# Altium PCB JUNORPCFront.PcbDoc (part 1 of 2)
Units mm, origin at the board's own origin, x right, y up, seen from the top; angles counter-clockwise.
Board outline 105.76 x 80.76 mm, 8 copper layers (Top Layer, Internal Plane 1, Signal Layer 1, Internal Plane 2, Signal Layer 2, Internal Plane 3, Internal Plane 4, Bottom Layer), stack 1.684 mm thick; 360 components, 183 nets, 1164 pads, 385 vias.
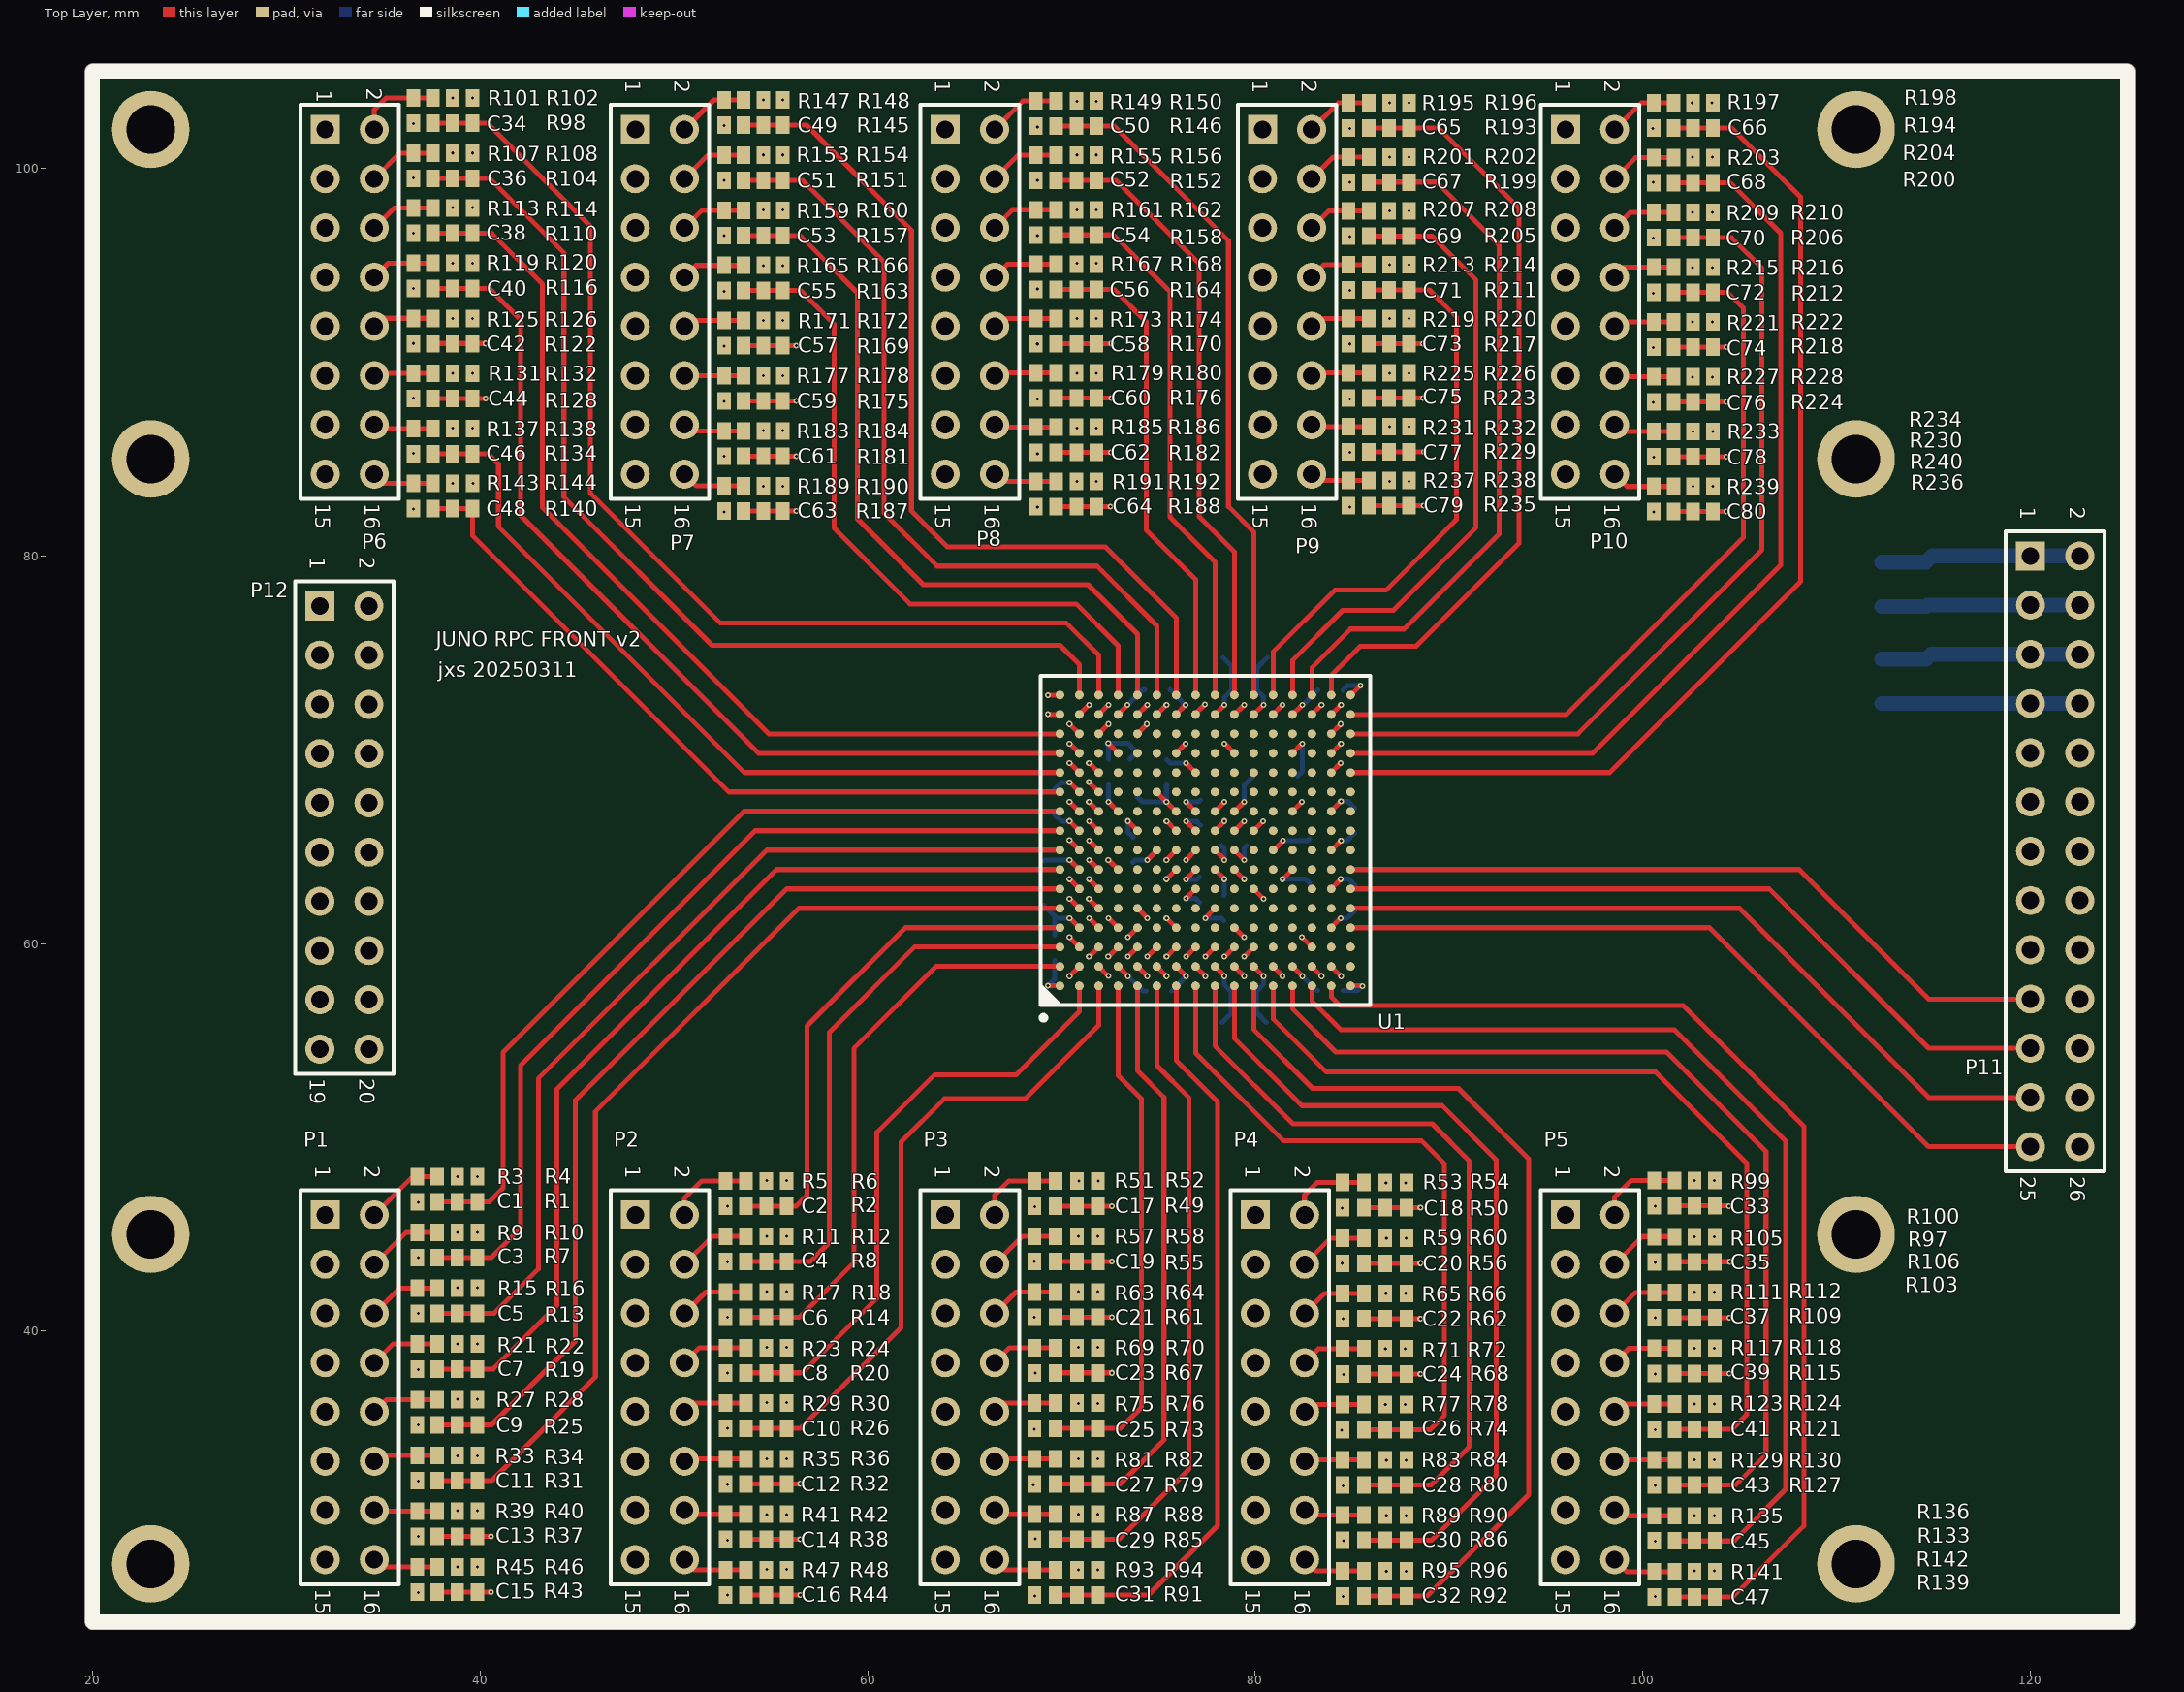
[diagram p0: Top Layer view]
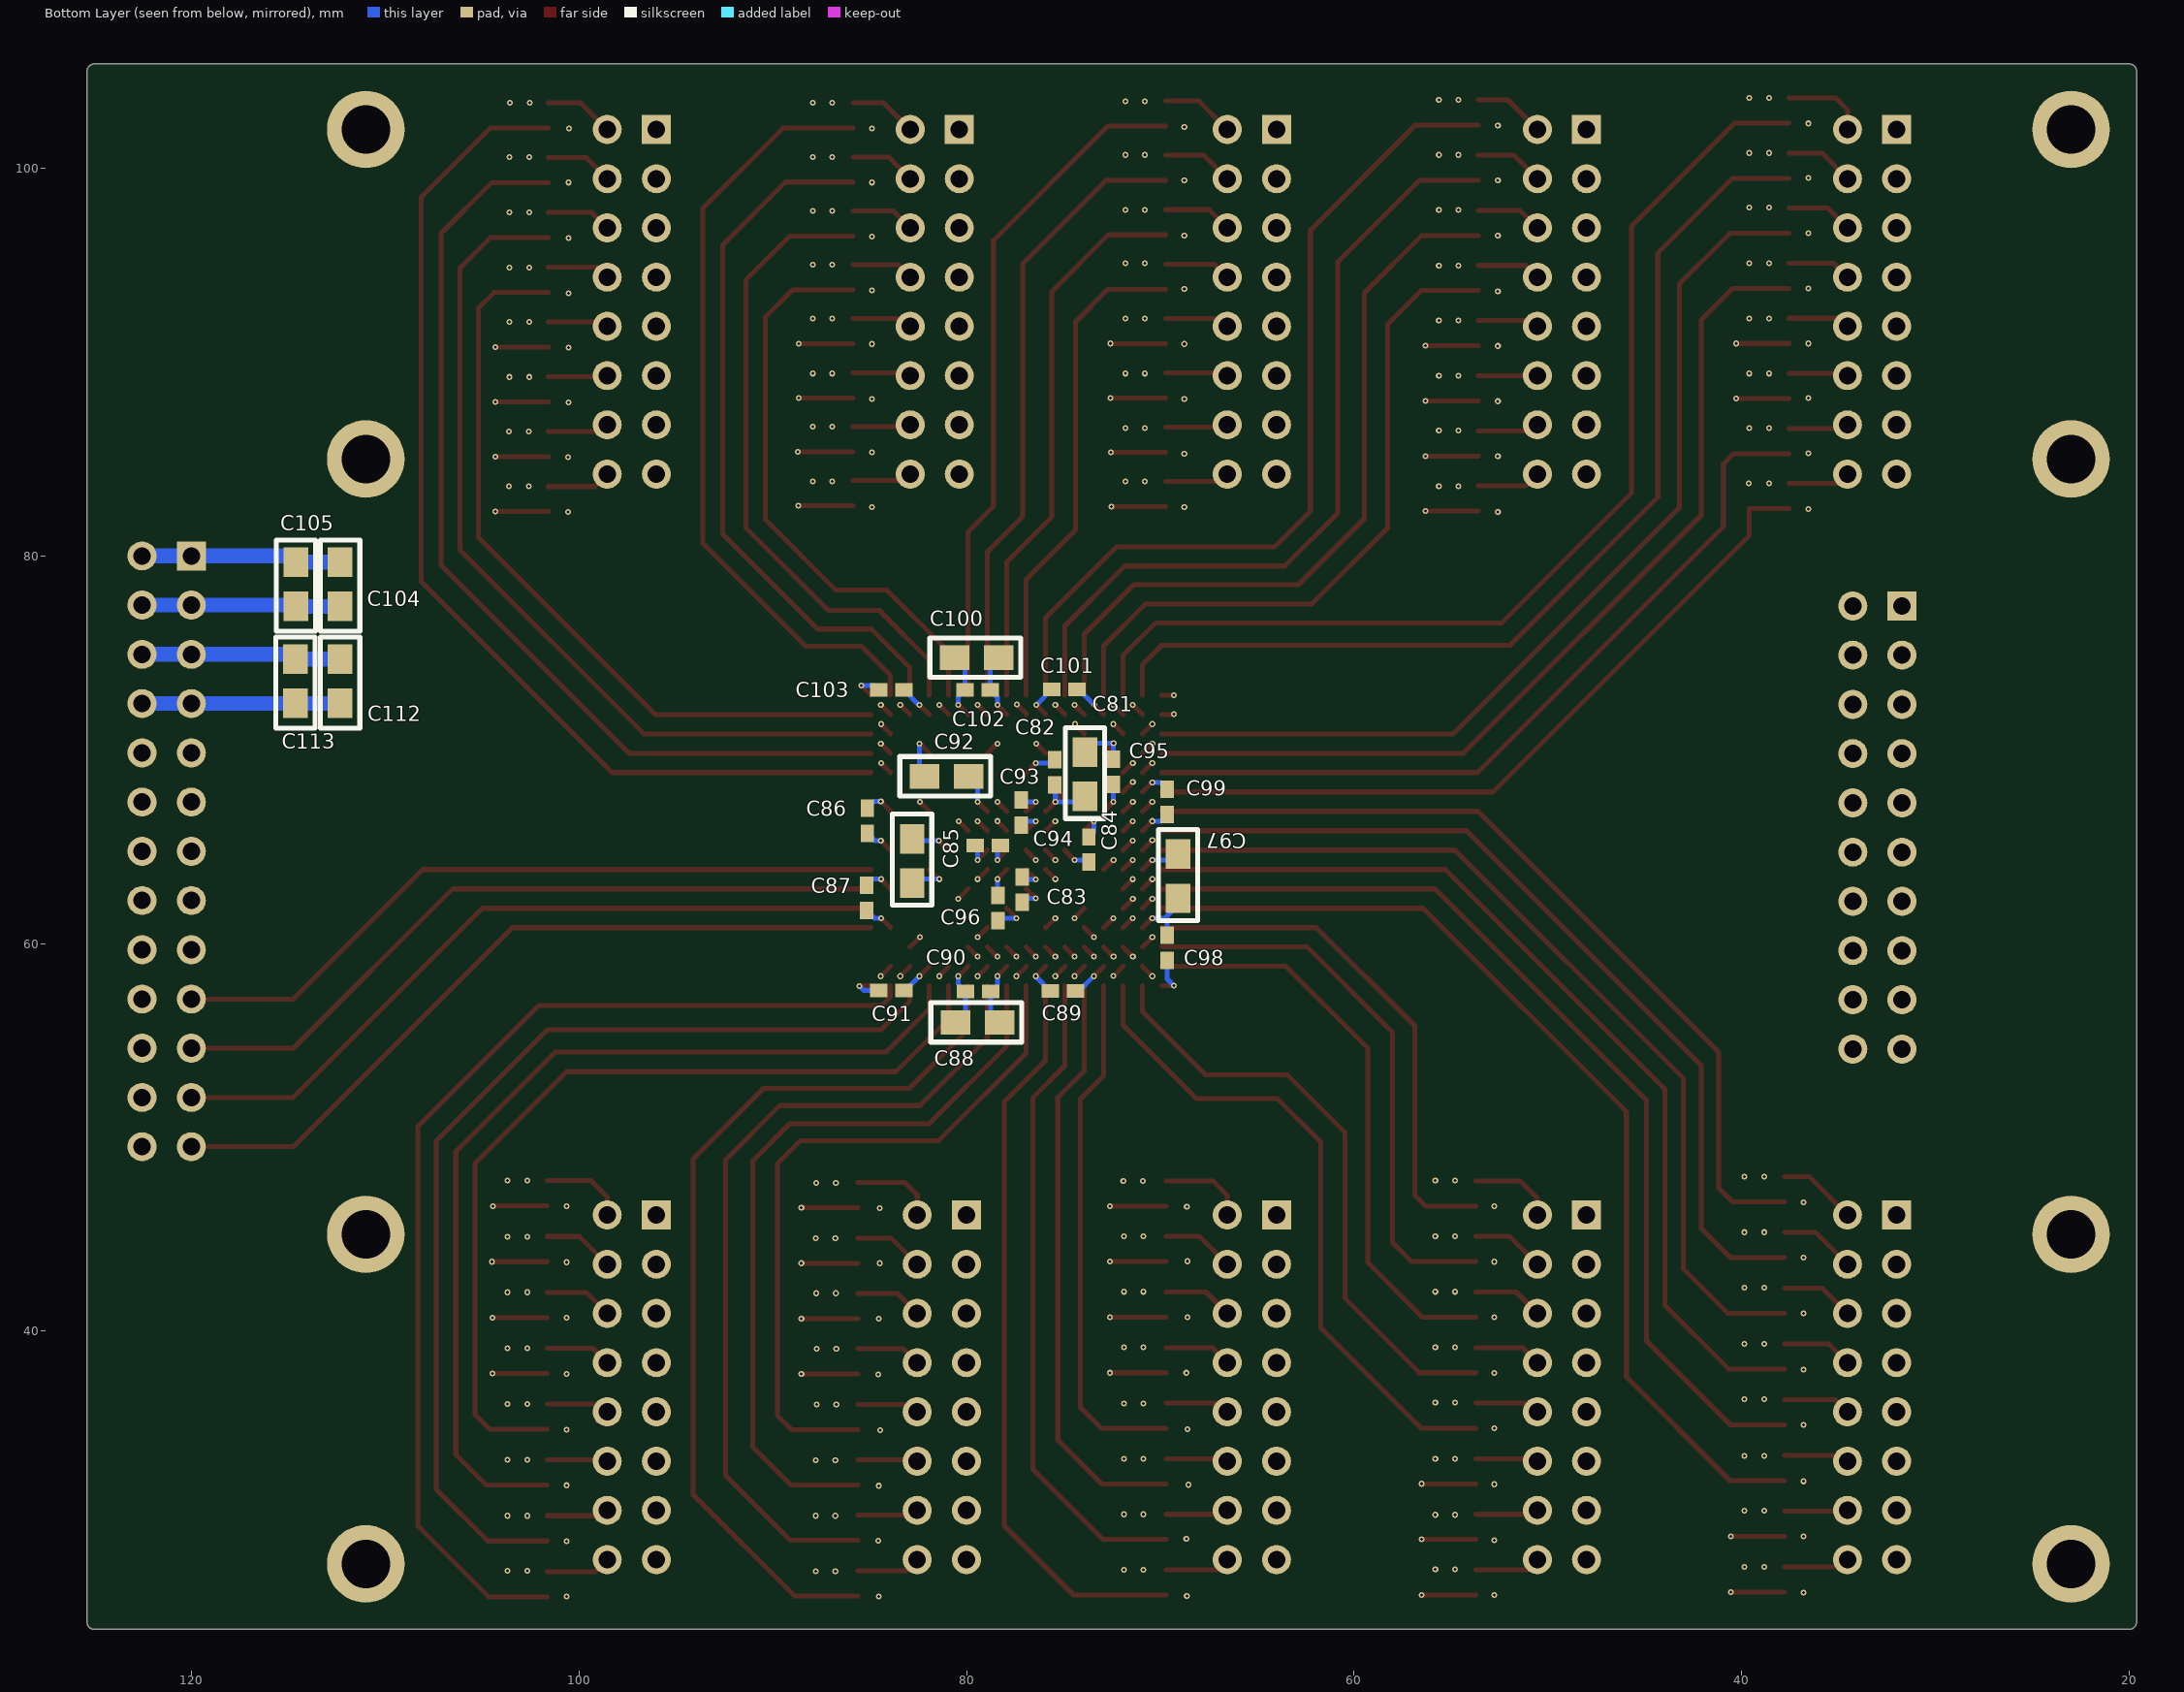
[diagram p1: Bottom Layer view, seen from below]
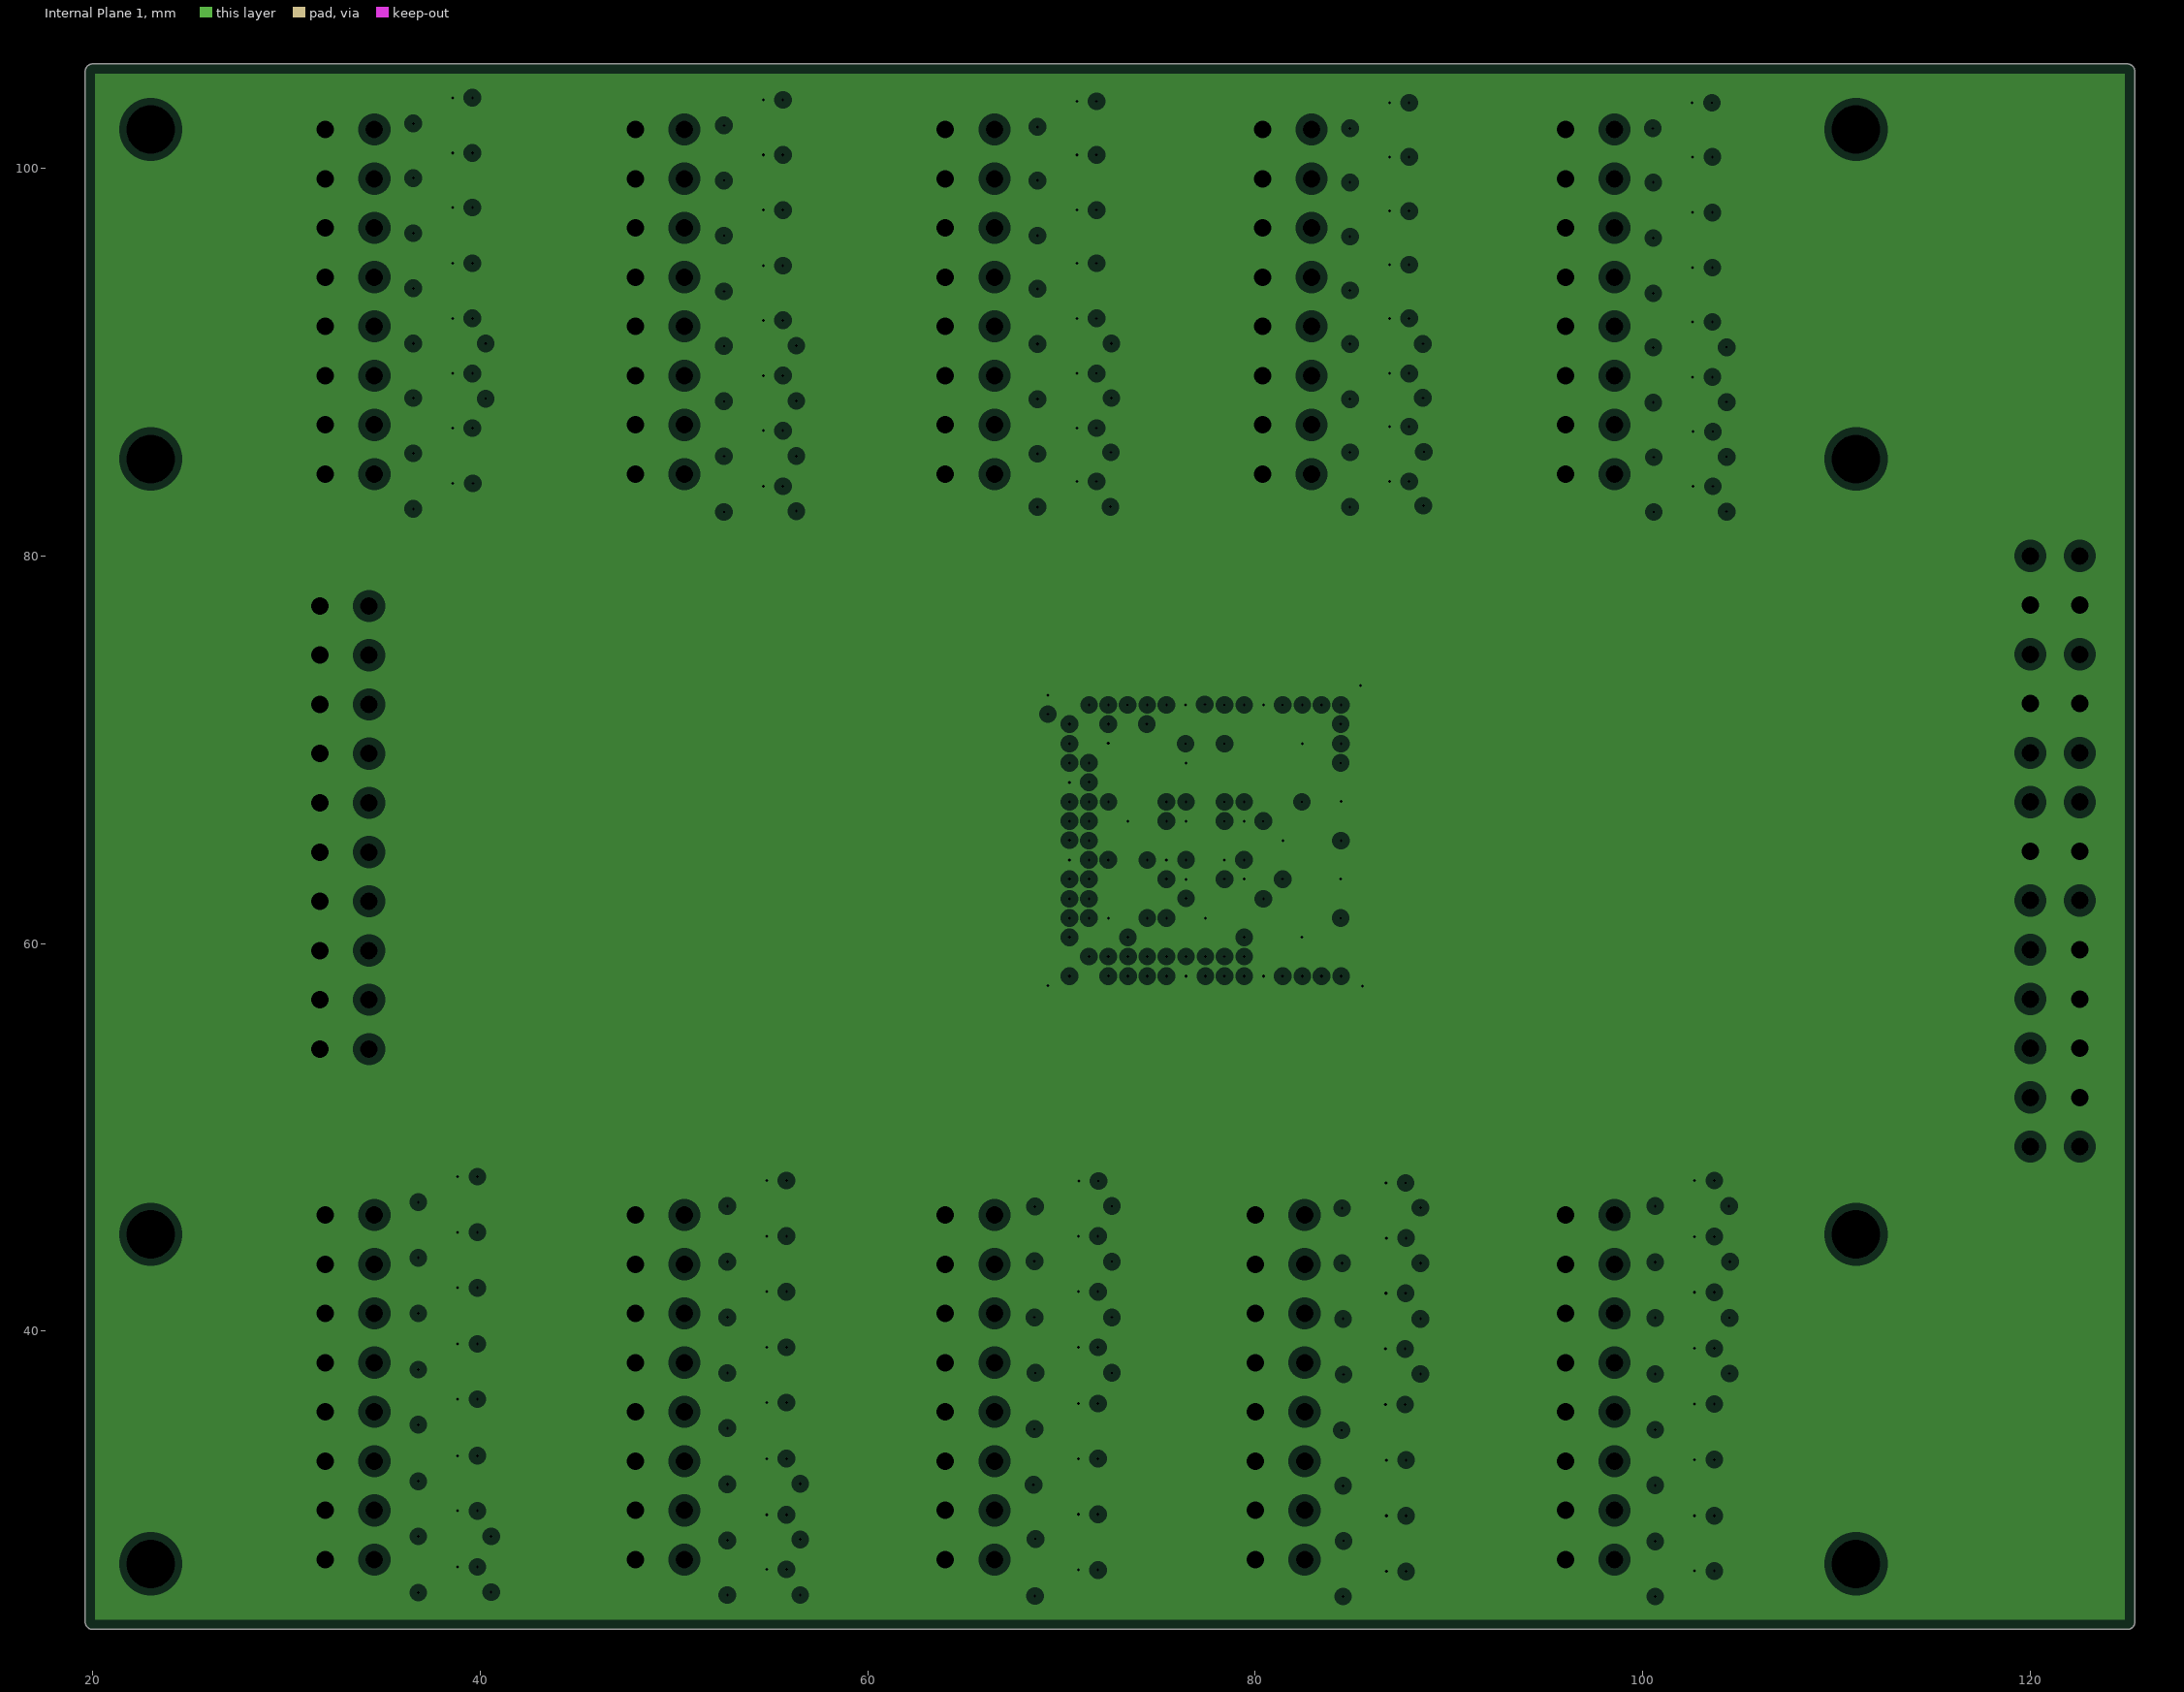
[diagram p2: Internal Plane 1, clearances drawn from the general rule]
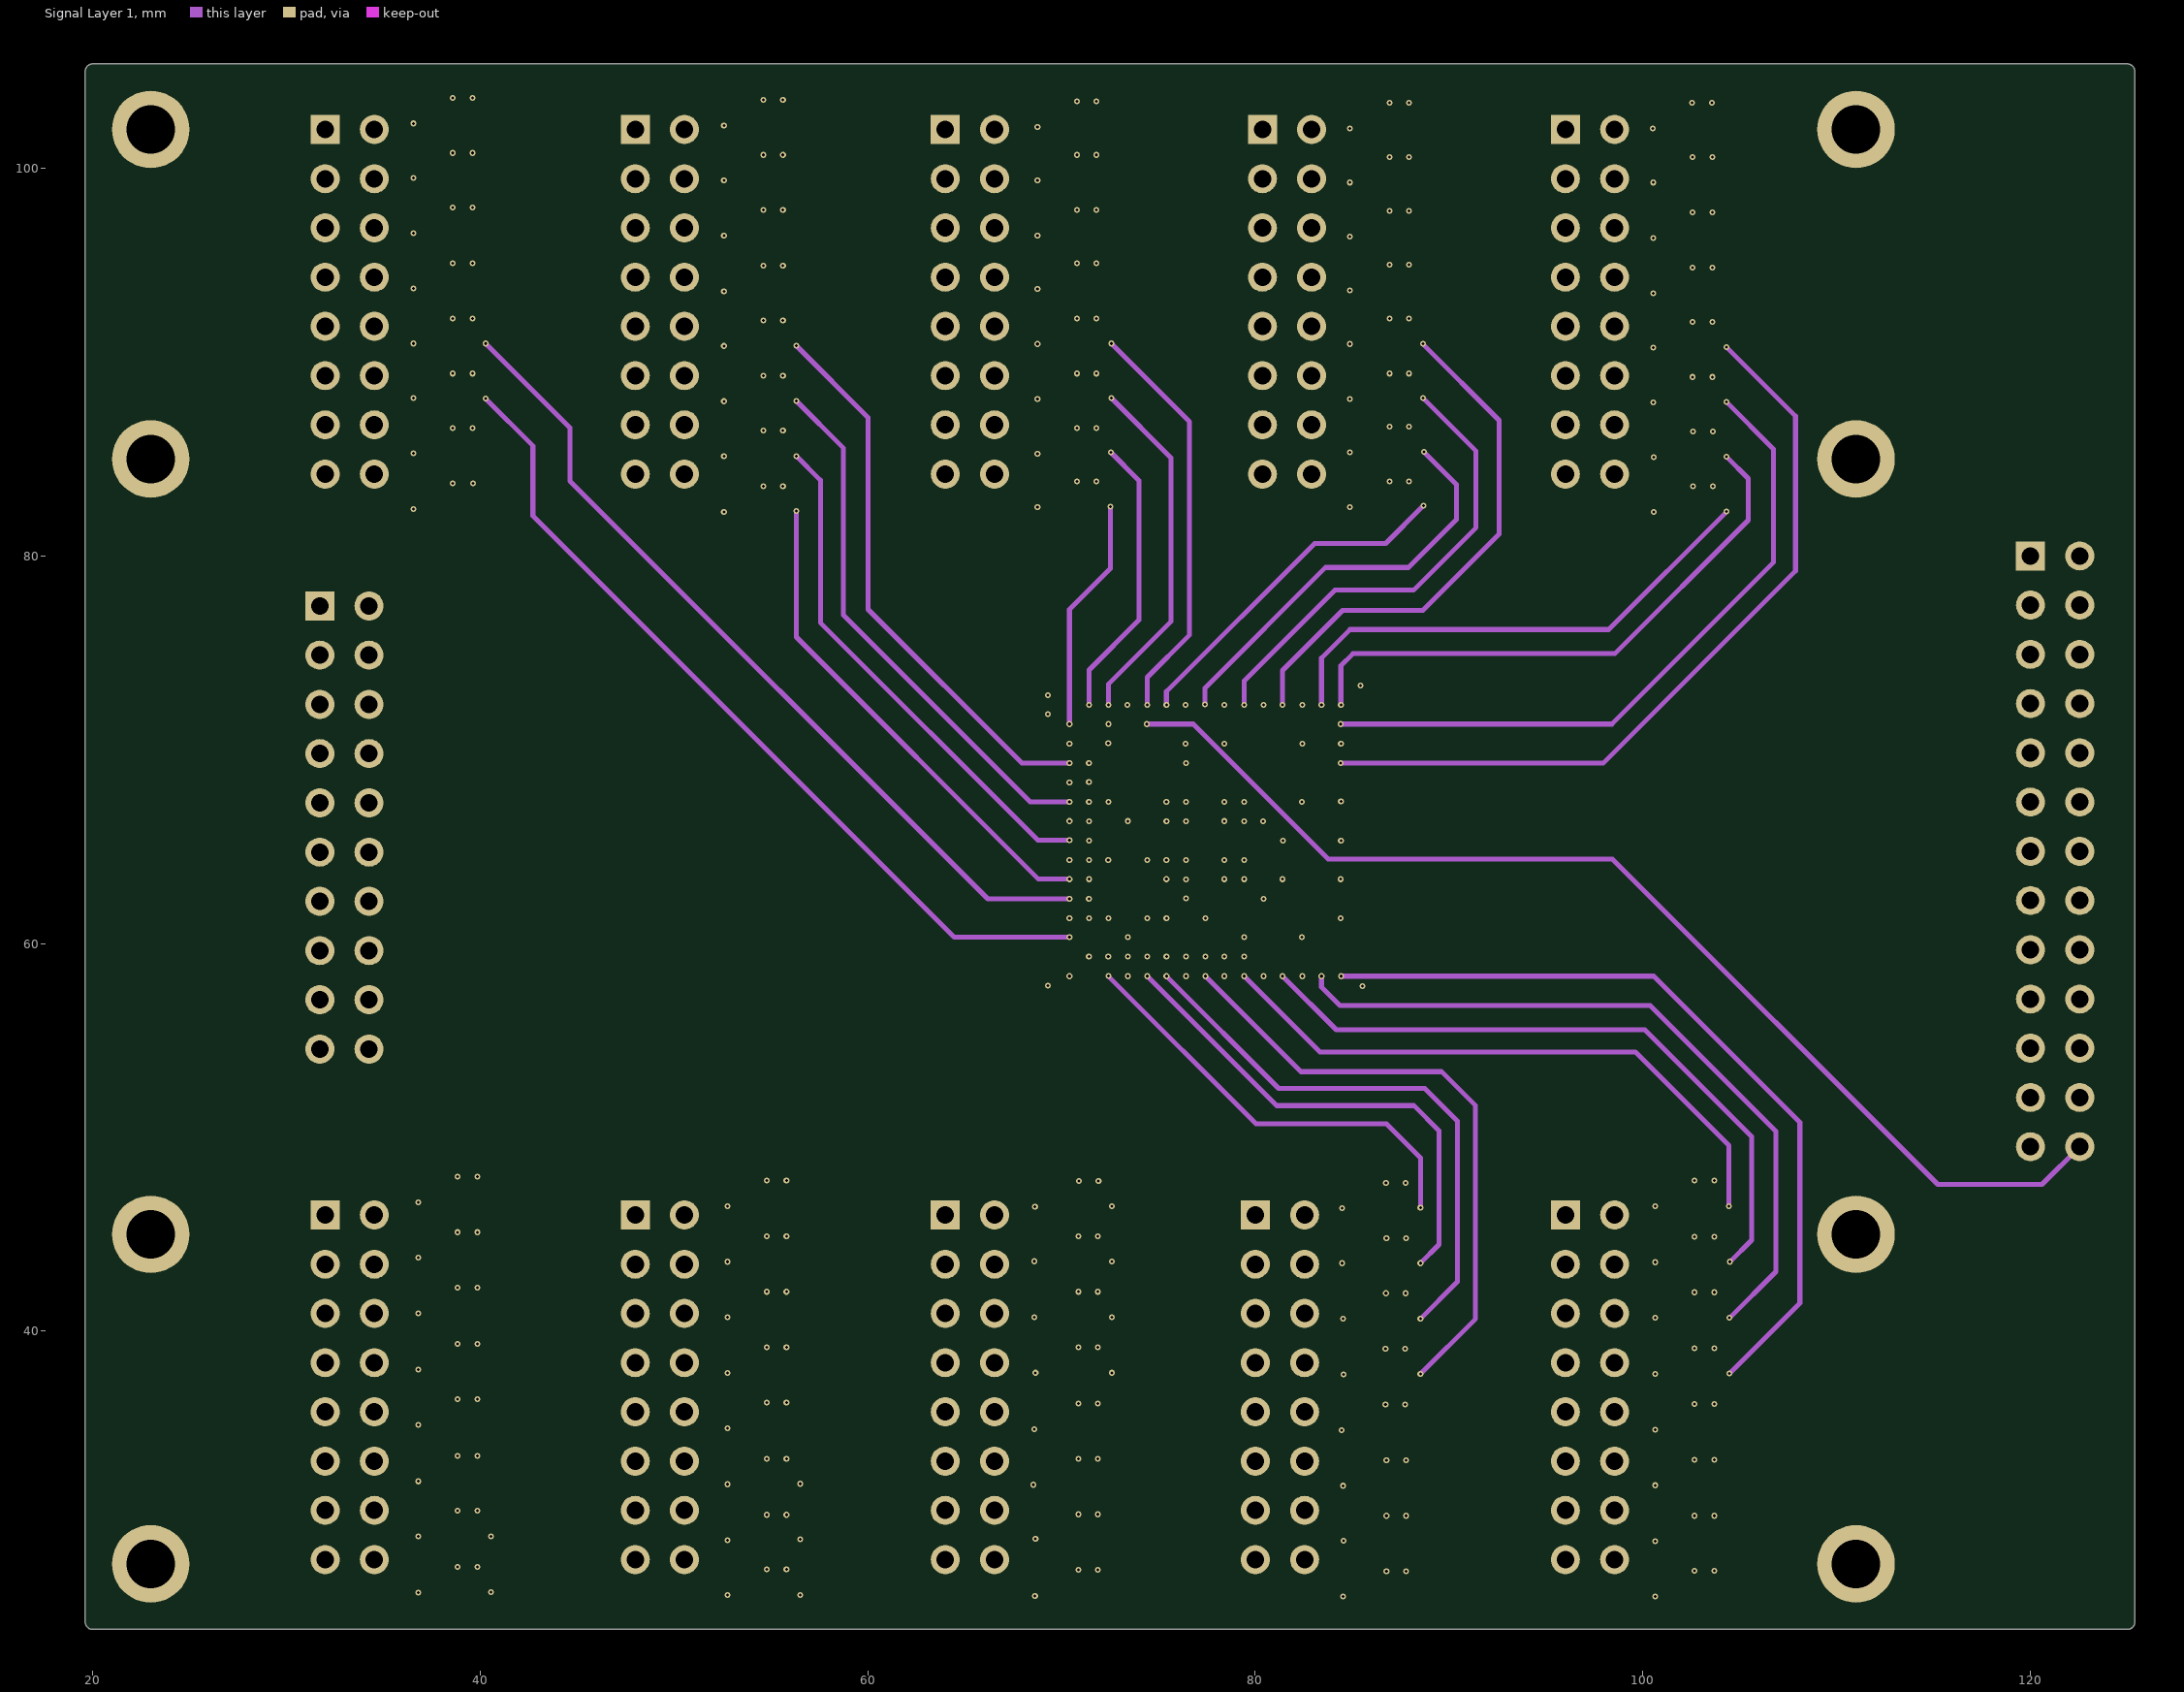
[diagram p3: Signal Layer 1]
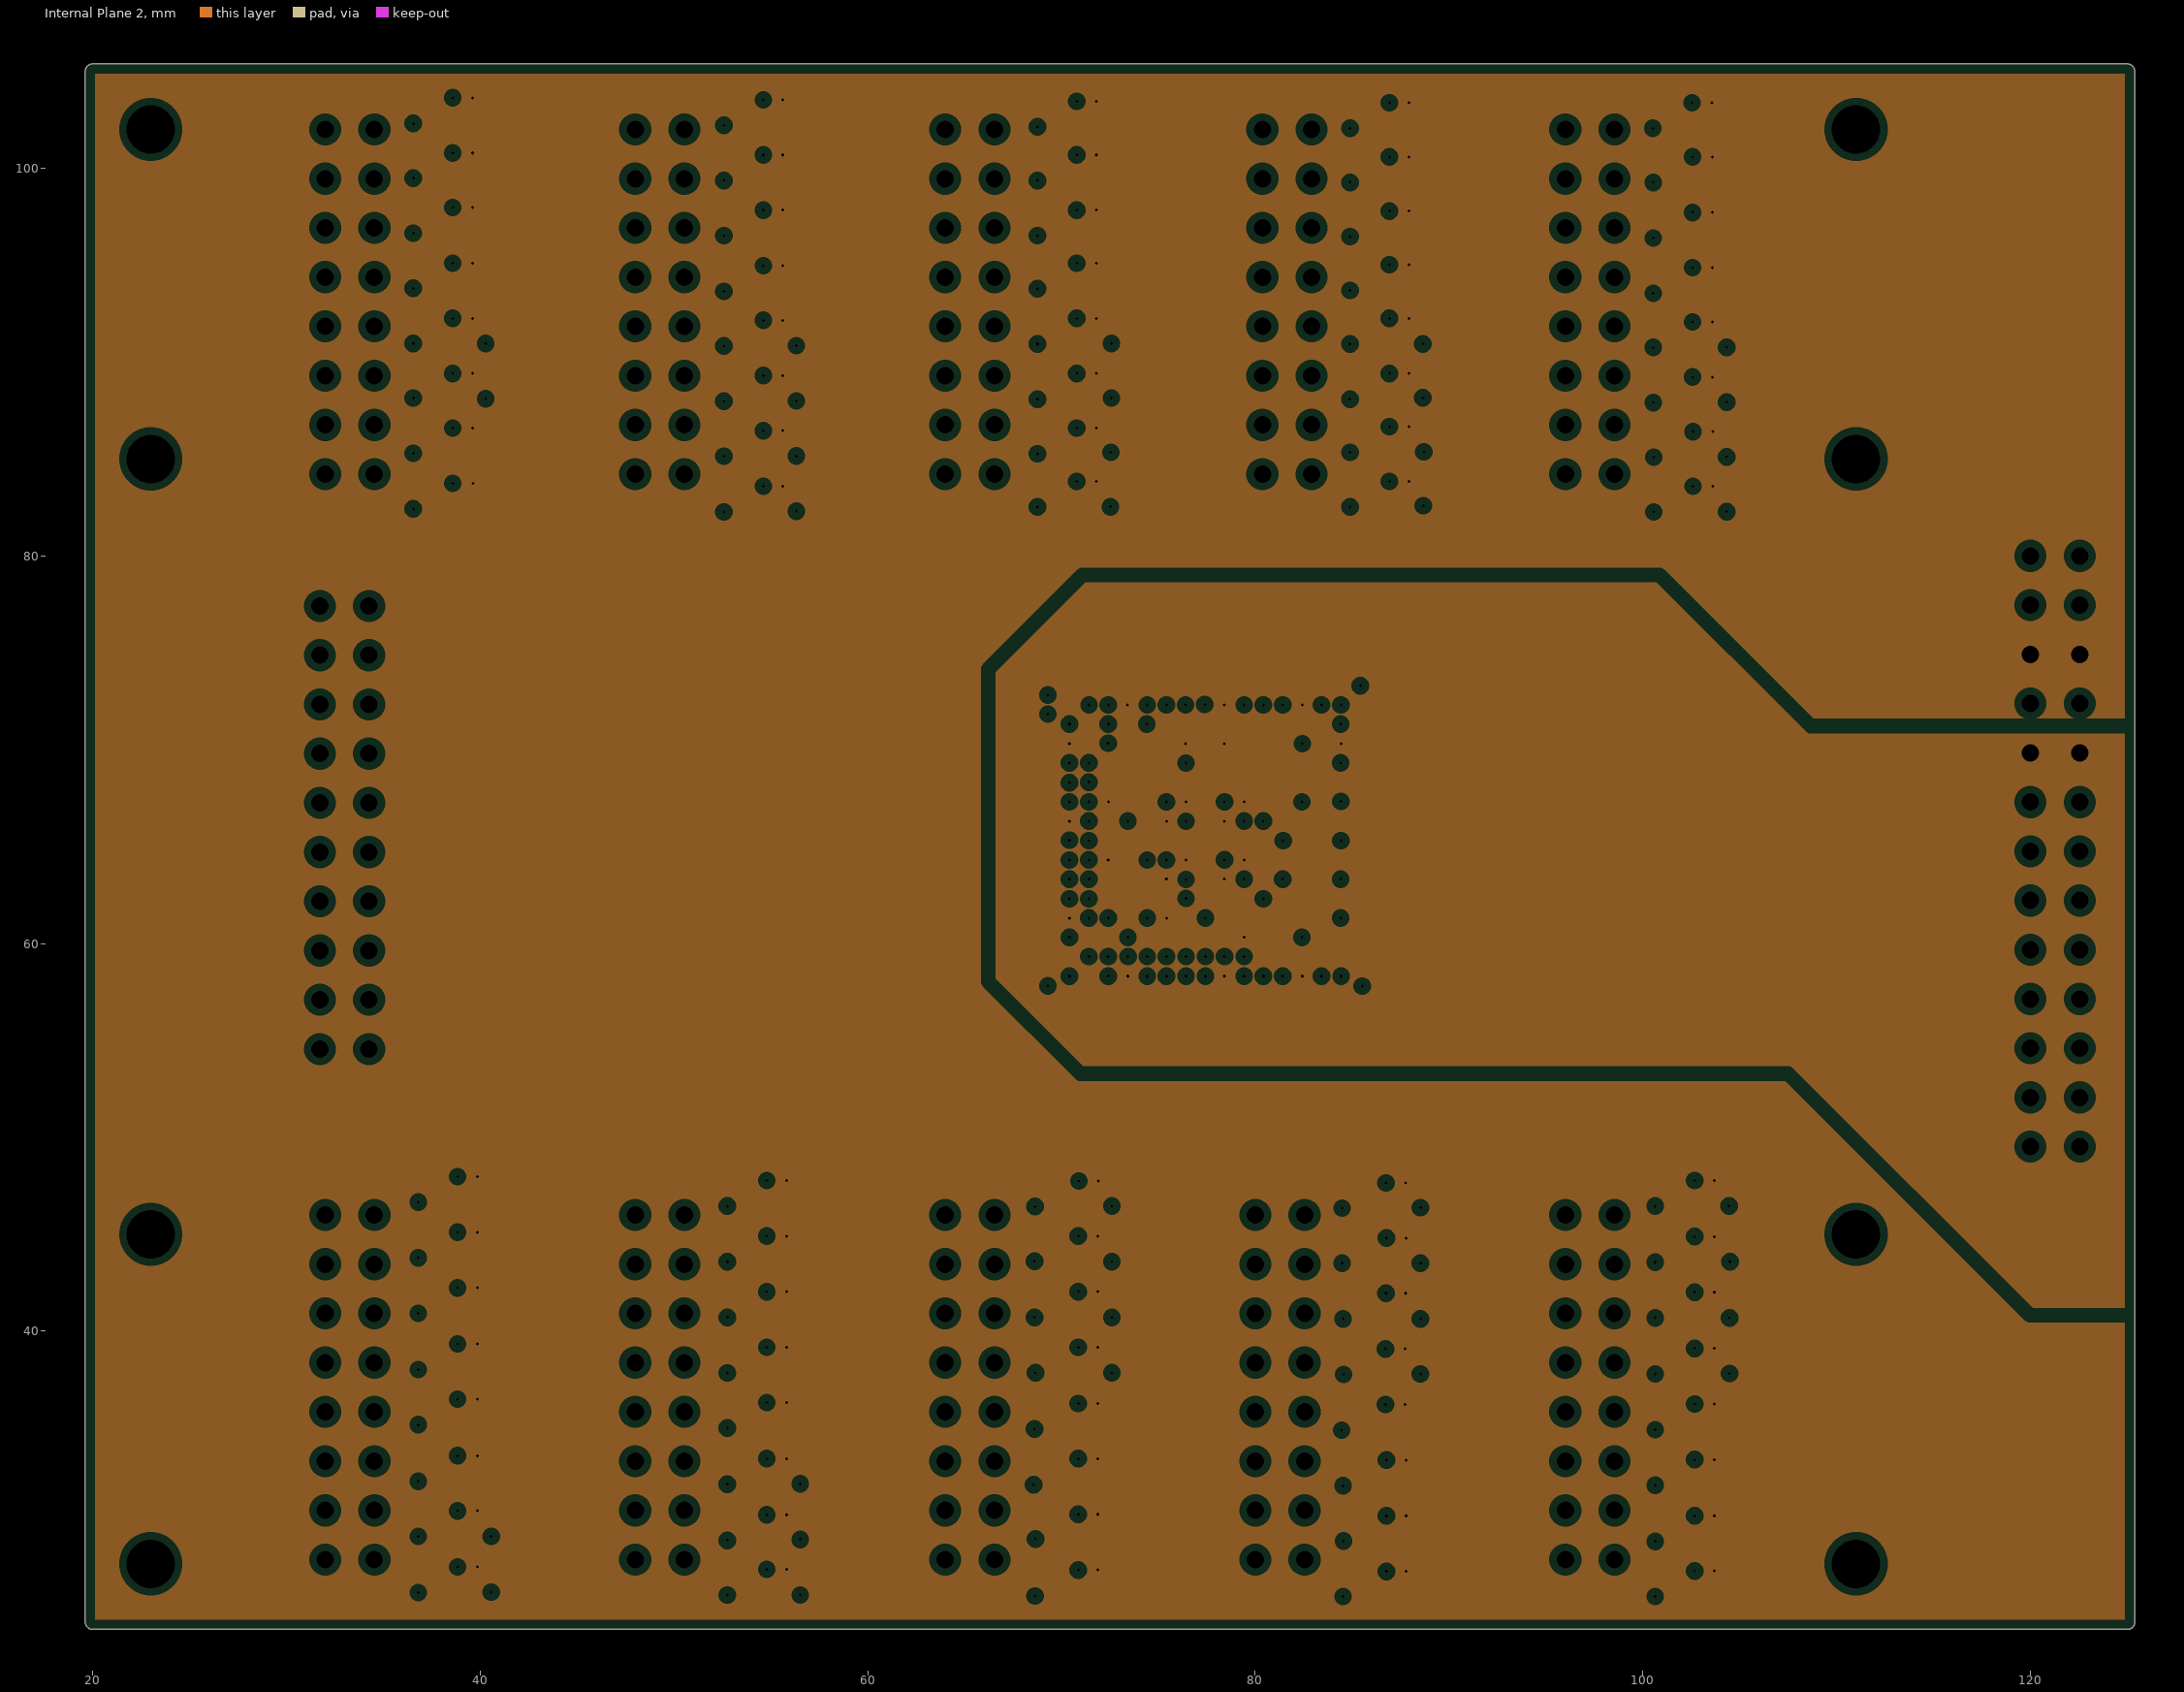
[diagram p4: Internal Plane 2, clearances drawn from the general rule]
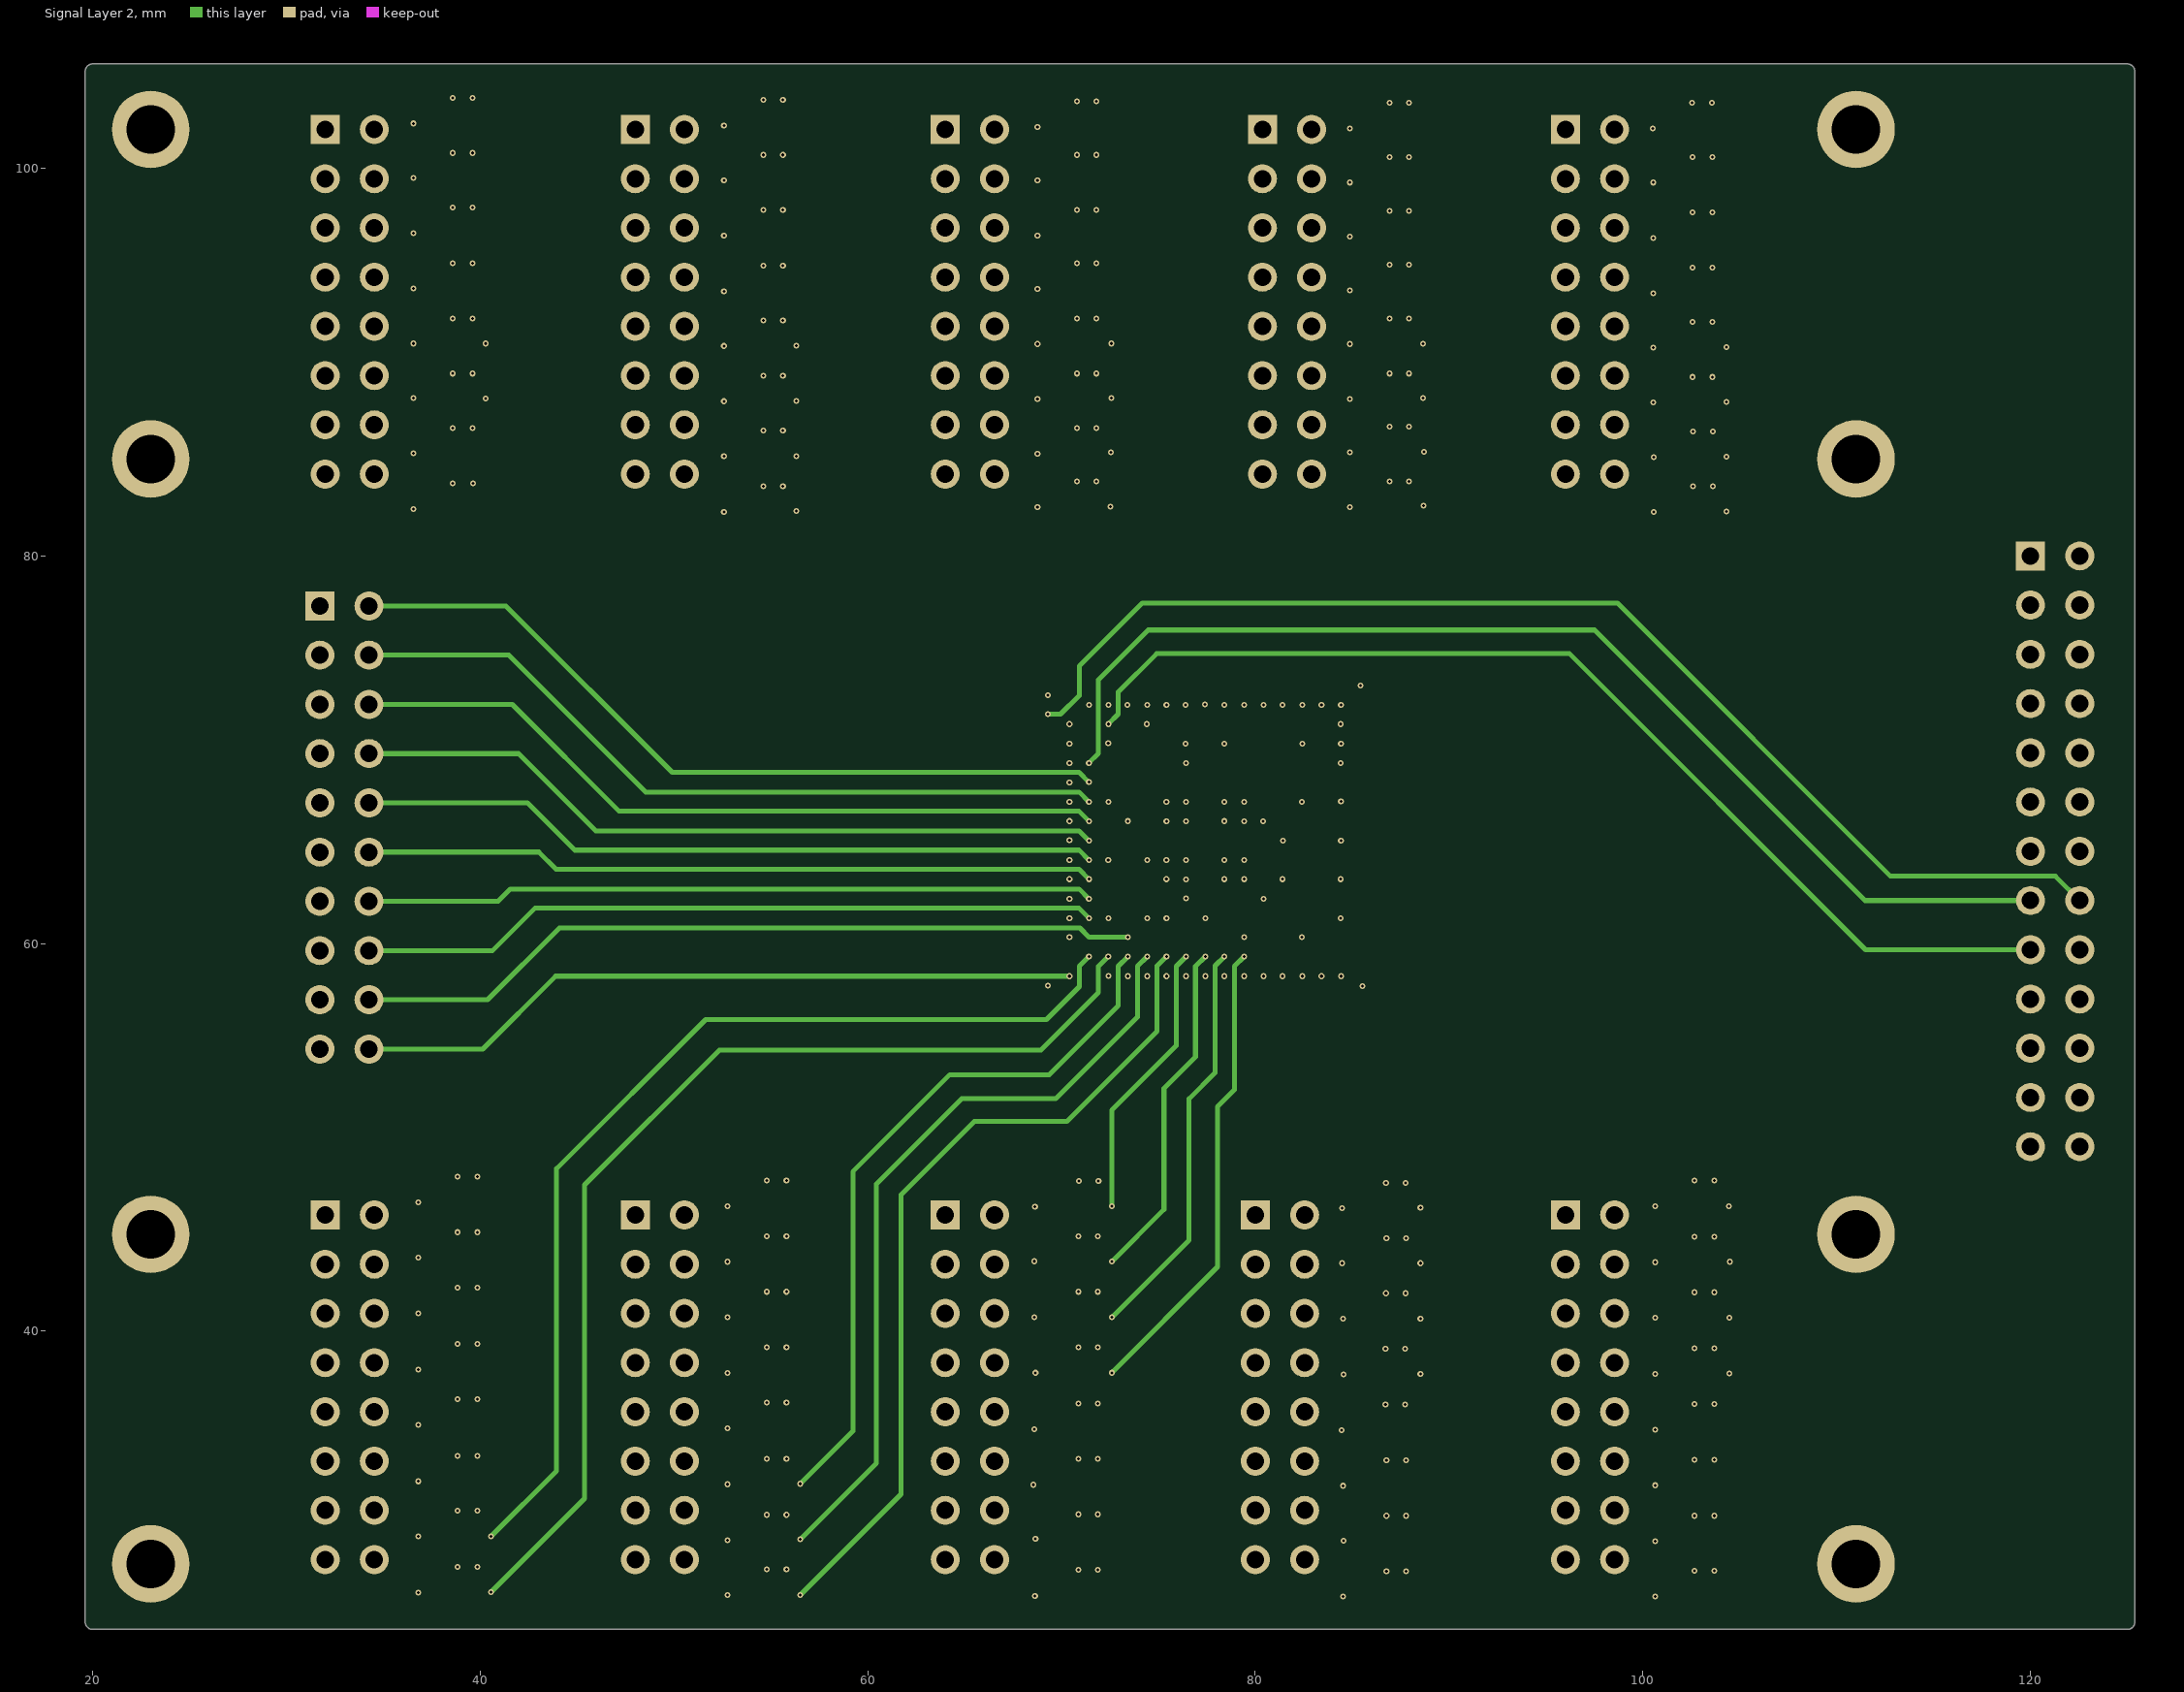
[diagram p5: Signal Layer 2]
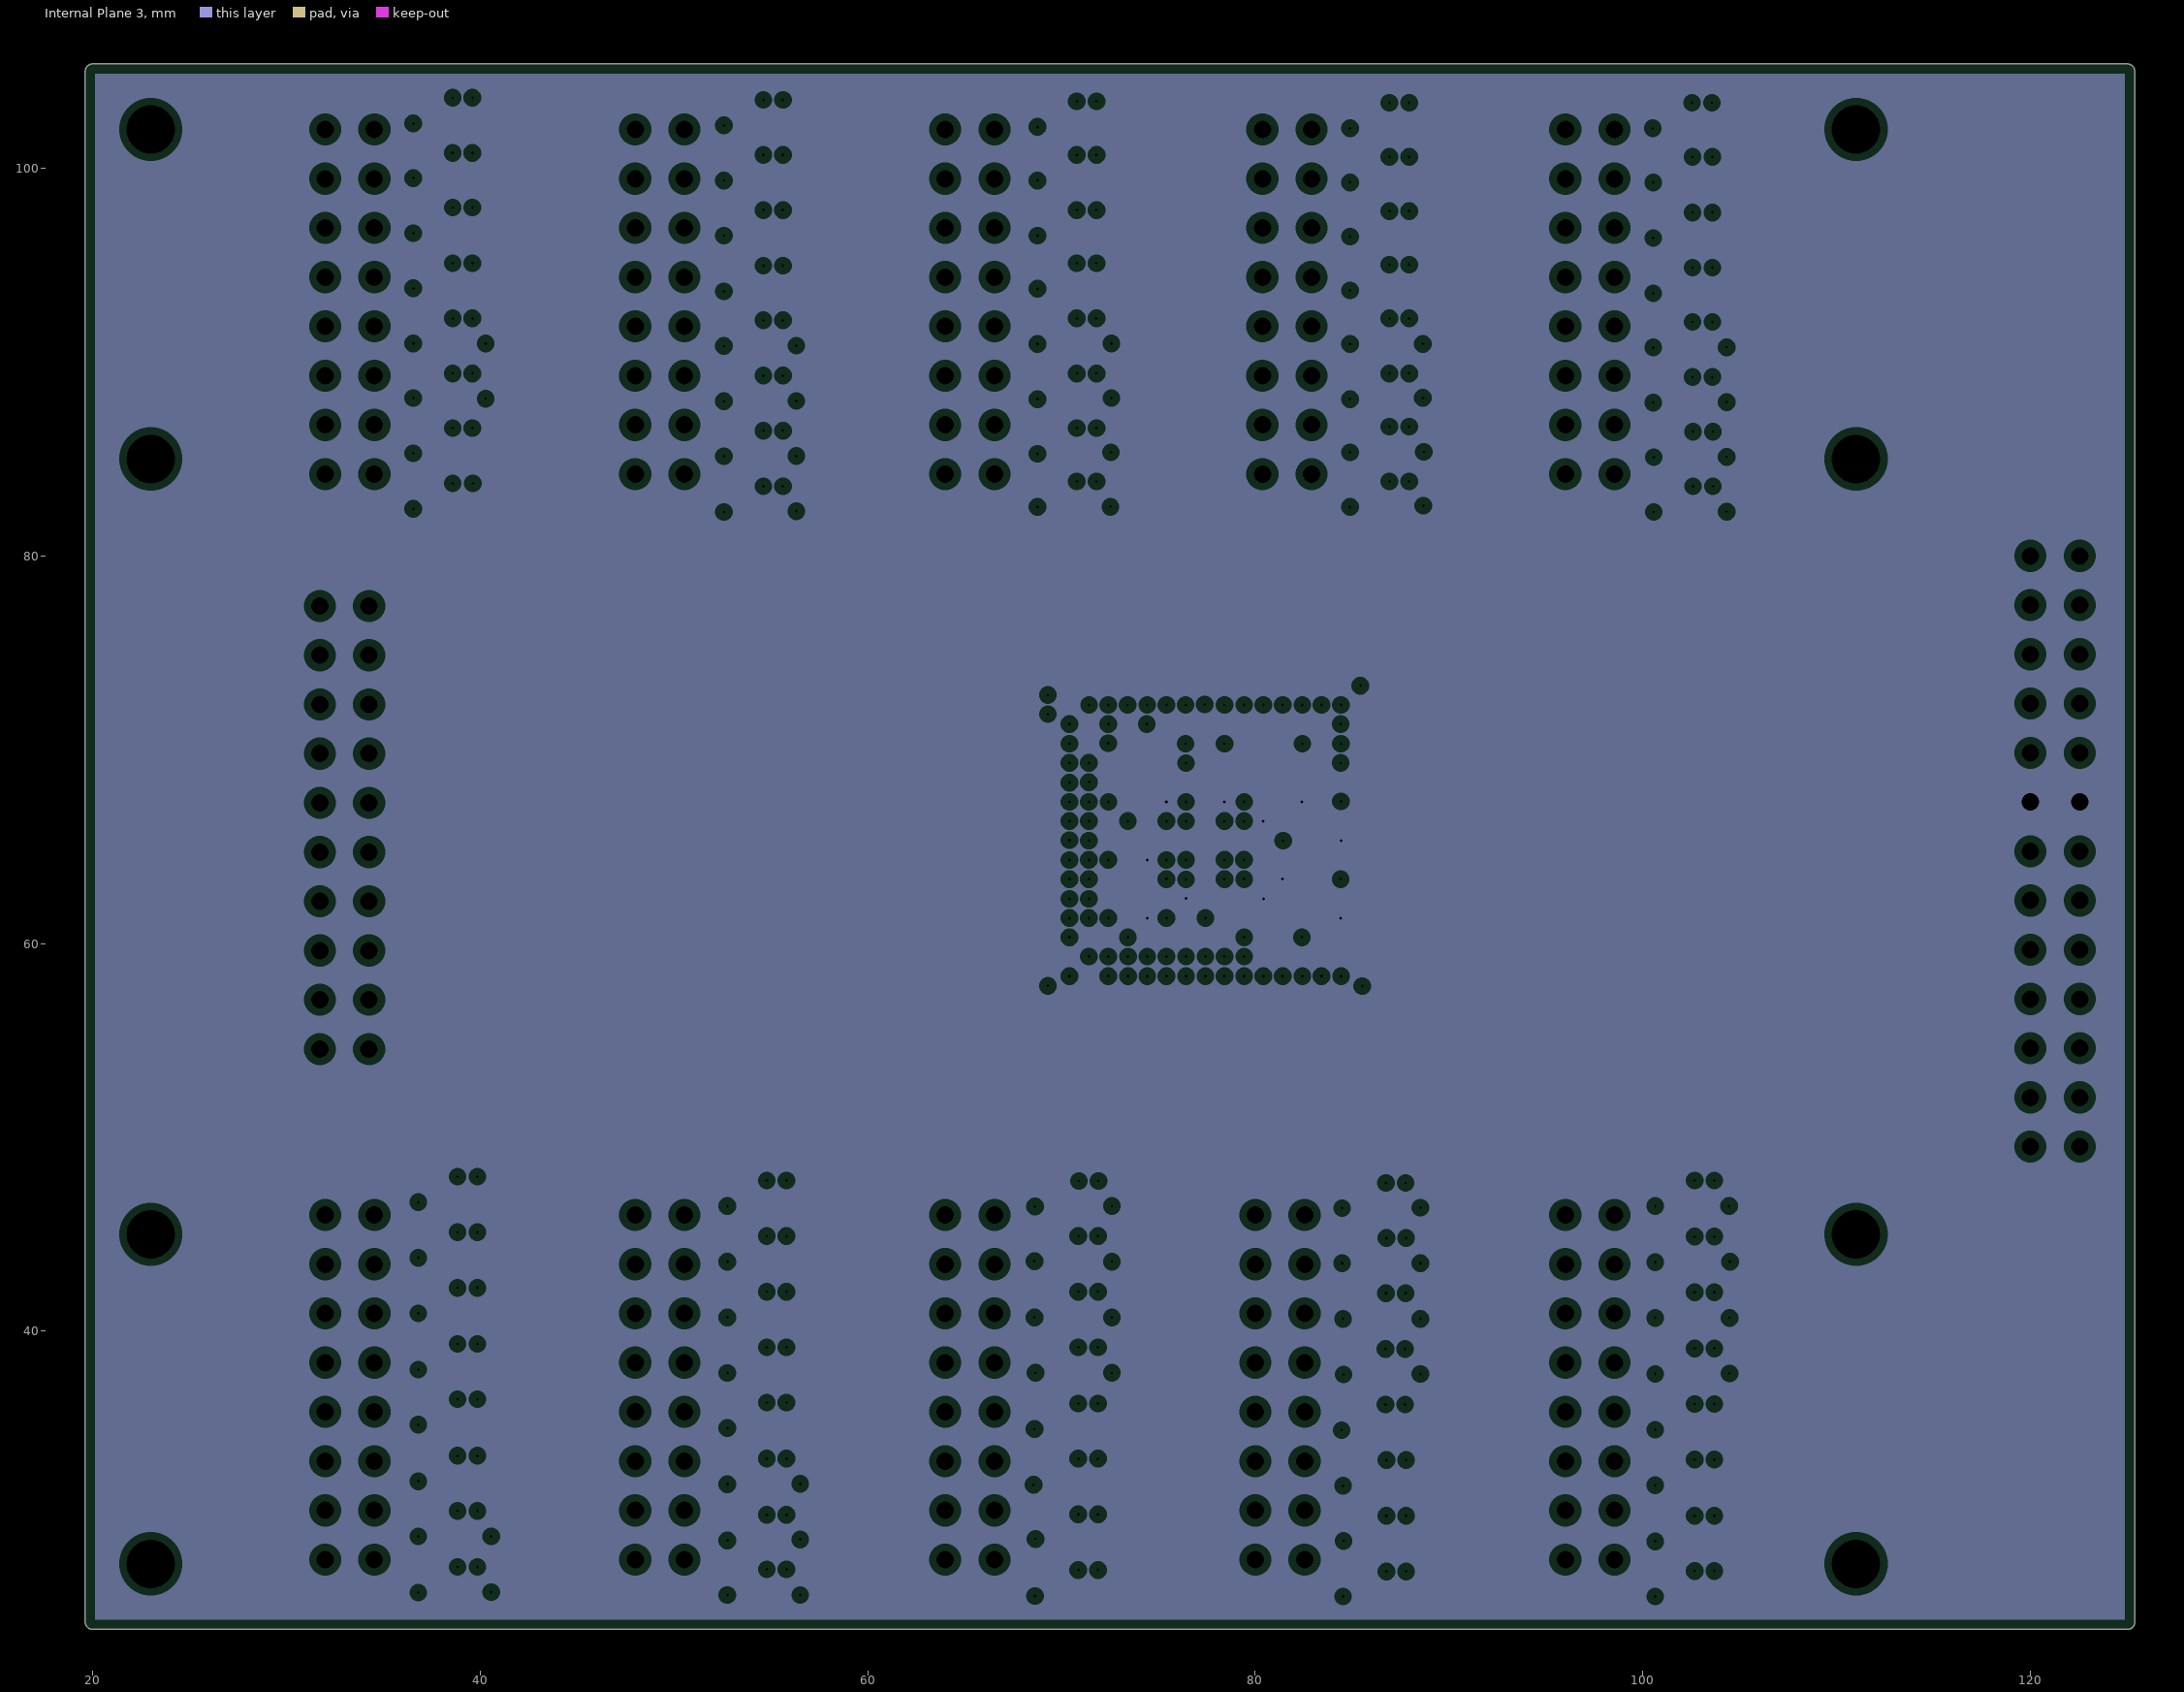
[diagram p6: Internal Plane 3, clearances drawn from the general rule]
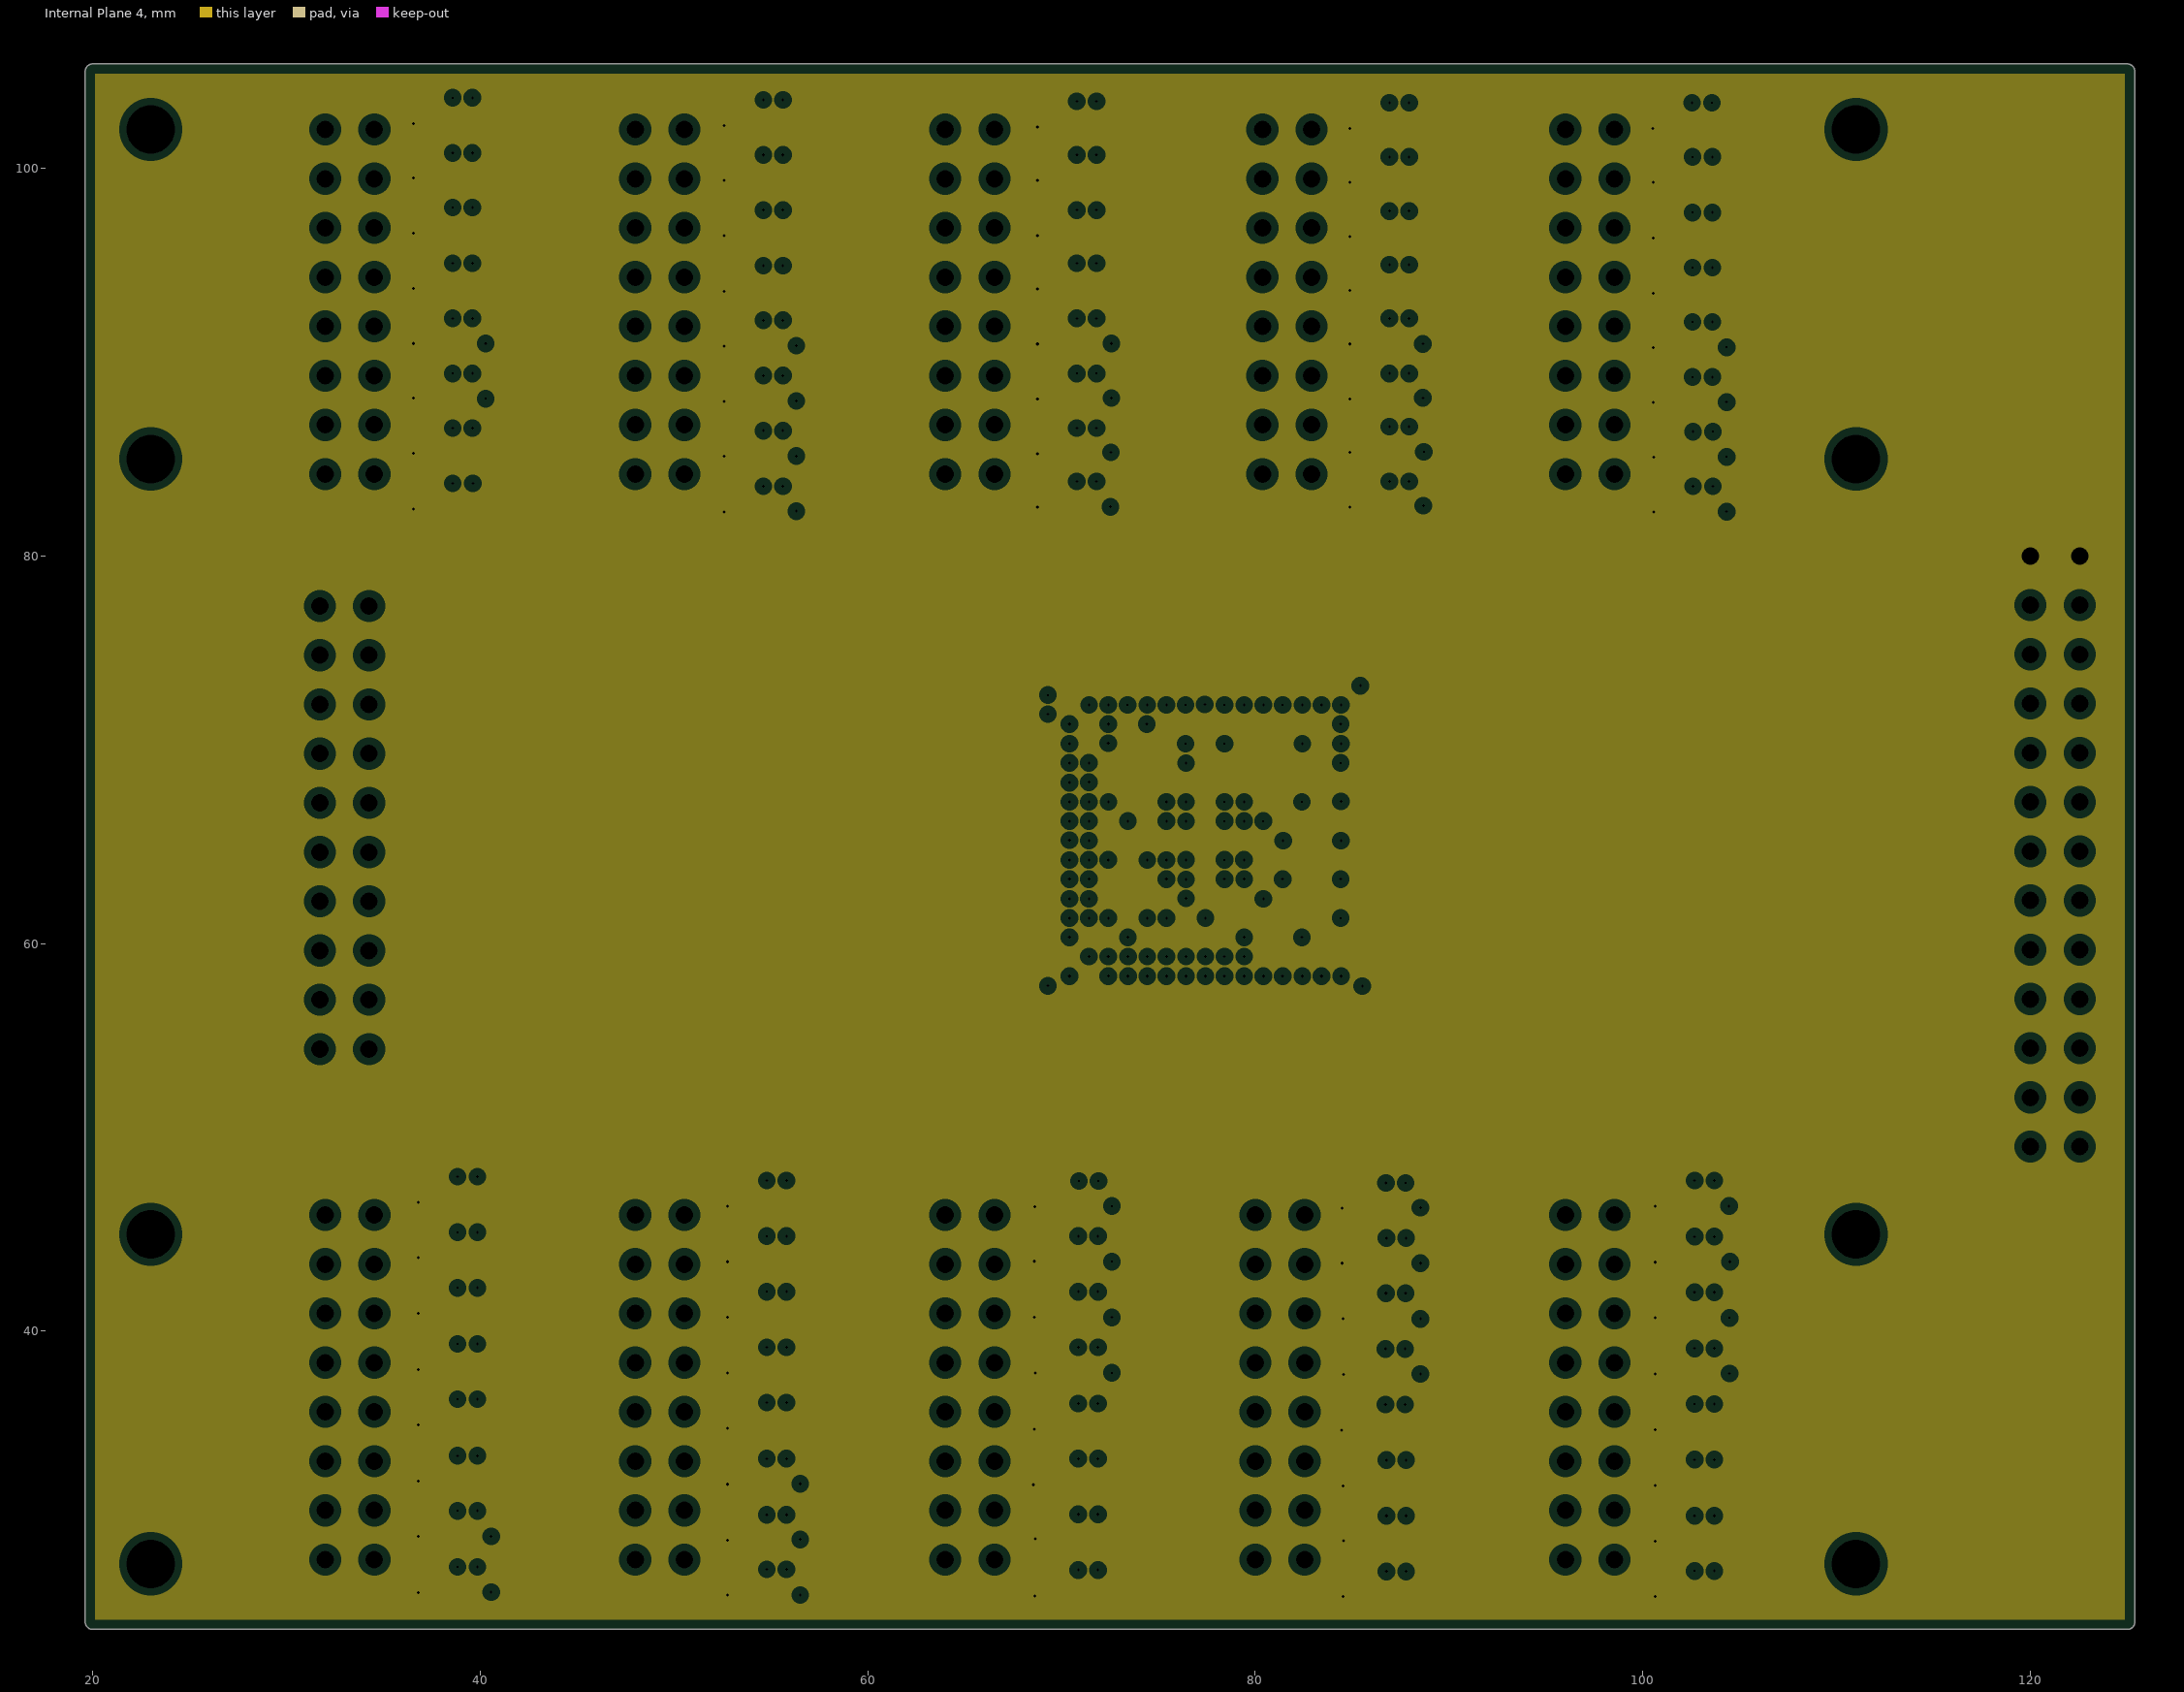
[diagram p7: Internal Plane 4, clearances drawn from the general rule]

## Layer stack, top to bottom
Top Solder: solder mask 0.0102, Solder Resist, Dk 3.5
Top Layer: signal copper 0.0356
Dielectric 1: core 0.254, FR-4, Dk 4.2
Internal Plane 1: plane copper 0.036, net GND
Dielectric 3: prepreg 0.127, Dk 4.2
Signal Layer 1: signal copper 0.036
Dielectric 4: core 0.254, Dk 4.2
Internal Plane 2: plane copper 0.036, net +1.2V
Dielectric 6: prepreg 0.127, Dk 4.2
Signal Layer 2: signal copper 0.036
Dielectric 5: core 0.254, Dk 4.2
Internal Plane 3: plane copper 0.036, net +3.3V
Dielectric 7: prepreg 0.127, Dk 4.2
Internal Plane 4: plane copper 0.036, net -5.2V
Dielectric 2: core 0.254, Dk 4.2
Bottom Layer: signal copper 0.0356
Bottom Solder: solder mask 0.0102, Solder Resist, Dk 3.5

## Board outline
20,24.619 125,24.619 ccw(c125,25) 125.381,25 125.381,105 ccw(c125,105) 125,105.381 20,105.381 ccw(c20,105) 19.619,105 19.619,25 ccw(c20,25)

## Design rules (kind name [scope] priority, off if disabled: settings)
Clearance [All] p1: gap=0 ignorepadtopadclearanceinfootprint=FALSE
ComponentClearance [All] p1: gap=0 collisioncheckmode=3 verticalgap=0 showdistances=FALSE
HoleToHoleClearance [All] p1: gap=0 allowstackedmicrovias=TRUE
MinimumSolderMaskSliver [All] p1: minsoldermaskwidth=0
PlaneClearance [All] p1: clearance=0.381
PlaneConnect [All] p1: planeconnectstyle=Relief reliefexpansion=0.508 reliefentries=4 reliefconductorwidth=0.254 reliefairgap=0.254
PolygonConnect [All] p1: connectstyle=Relief reliefconductorwidth=0.254 reliefentries=4 polygonreliefangle="90 Angle" airgapwidth=0.254
RoutingVias [All] p1: holewidth=0.152 width=0.305 viastyle="Through Hole" minholewidth=0.152 minwidth=0.305 maxholewidth=0.711 maxwidth=1.27
SilkToSilkClearance [All] p1: silktosilkclearance=0
SilkToSolderMaskClearance [IsPad] p1: minsilkscreentomaskgap=0 clearancetoexposedcopper=TRUE
SolderMaskExpansion [All] p1: expansion=0.102
Width [All] p1: maxlimit=0.762 minlimit=0.152 preferedwidth=0.254 minimp=50.000000 maximp=50.000000 favimp=50.000000
23 further rules are at their usual default settings.

## Classes and differential pairs
component class main: C104 C105 C112 C113 P11 P12
component class XC6SLX09-2FTG256C: C81 C82 C83 C84 C85 C86 C87 C88 C89 C90 C91 C92 C93 C94 C95 C96 C97 C98 C99 C100 C101 C102 C103 U1
component class input5: C65 C66 C67 C68 C69 C70 C71 C72 C73 C74 C75 C76 C77 C78 C79 C80 P9 P10 R193 R194 R195 R196 R197 R198 R199 R200 R201 R202 R203 R204 R205 R206 R207 R208 R209 R210 R211 R212 R213 R214 R215 R216 R217 R218 R219 R220 R221 R222 R223 R224 R225 R226 R227 R228 R229 R230 R231 R232 R233 R234 R235 R236 R237 R238 R239 R240
component class input4: C49 C50 C51 C52 C53 C54 C55 C56 C57 C58 C59 C60 C61 C62 C63 C64 P7 P8 R145 R146 R147 R148 R149 R150 R151 R152 R153 R154 R155 R156 R157 R158 R159 R160 R161 R162 R163 R164 R165 R166 R167 R168 R169 R170 R171 R172 R173 R174 R175 R176 R177 R178 R179 R180 R181 R182 R183 R184 R185 R186 R187 R188 R189 R190 R191 R192
component class input3: C33 C34 C35 C36 C37 C38 C39 C40 C41 C42 C43 C44 C45 C46 C47 C48 P5 P6 R97 R98 R99 R100 R101 R102 R103 R104 R105 R106 R107 R108 R109 R110 R111 R112 R113 R114 R115 R116 R117 R118 R119 R120 R121 R122 R123 R124 R125 R126 R127 R128 R129 R130 R131 R132 R133 R134 R135 R136 R137 R138 R139 R140 R141 R142 R143 R144
component class input2: C17 C18 C19 C20 C21 C22 C23 C24 C25 C26 C27 C28 C29 C30 C31 C32 P3 P4 R49 R50 R51 R52 R53 R54 R55 R56 R57 R58 R59 R60 R61 R62 R63 R64 R65 R66 R67 R68 R69 R70 R71 R72 R73 R74 R75 R76 R77 R78 R79 R80 R81 R82 R83 R84 R85 R86 R87 R88 R89 R90 R91 R92 R93 R94 R95 R96
component class input1: C1 C2 C3 C4 C5 C6 C7 C8 C9 C10 C11 C12 C13 C14 C15 C16 P1 P2 R1 R2 R3 R4 R5 R6 R7 R8 R9 R10 R11 R12 R13 R14 R15 R16 R17 R18 R19 R20 R21 R22 R23 R24 R25 R26 R27 R28 R29 R30 R31 R32 R33 R34 R35 R36 R37 R38 R39 R40 R41 R42 R43 R44 R45 R46 R47 R48

## Components (designator, comment, footprint, x,y, rotation, side; value= is the part's Value field where it differs from the comment)
C1 "jc1.0" 0402 37.787,47.335 r270 top value=0.001uF
C2 "jc1.0" 0402 53.704,47.107 r270 top value=0.001uF
C3 "jc1.0" 0402 37.787,44.458 r270 top value=0.001uF
C4 "jc1.0" 0402 53.704,44.24 r270 top value=0.001uF
C5 "jc1.0" 0402 37.787,41.58 r270 top value=0.001uF
C6 "jc1.0" 0402 53.704,41.373 r270 top value=0.001uF
C7 "jc1.0" 0402 37.787,38.703 r270 top value=0.001uF
C8 "jc1.0" 0402 53.704,38.507 r270 top value=0.001uF
C9 "jc1.0" 0402 37.787,35.825 r270 top value=0.001uF
C10 "jc1.0" 0402 53.704,35.64 r270 top value=0.001uF
C11 "jc1.0" 0402 37.787,32.948 r270 top value=0.001uF
C12 "jc1.0" 0402 53.704,32.774 r270 top value=0.001uF
C13 "jc1.0" 0402 37.787,30.07 r270 top value=0.001uF
C14 "jc1.0" 0402 53.704,29.907 r270 top value=0.001uF
C15 "jc1.0" 0402 37.787,27.193 r270 top value=0.001uF
C16 "jc1.0" 0402 53.704,27.041 r270 top value=0.001uF
C17 "jc1.0" 0402 69.698,47.107 r270 top value=0.001uF
C18 "jc1.0" 0402 85.606,47.015 r270 top value=0.001uF
C19 "jc1.0" 0402 69.698,44.24 r270 top value=0.001uF
C20 "jc1.0" 0402 85.606,44.156 r270 top value=0.001uF
C21 "jc1.0" 0402 69.698,41.373 r270 top value=0.001uF
C22 "jc1.0" 0402 85.606,41.297 r270 top value=0.001uF
C23 "jc1.0" 0402 69.698,38.507 r270 top value=0.001uF
C24 "jc1.0" 0402 85.606,38.437 r270 top value=0.001uF
C25 "jc1.0" 0402 69.698,35.64 r270 top value=0.001uF
C26 "jc1.0" 0402 85.606,35.578 r270 top value=0.001uF
C27 "jc1.0" 0402 69.698,32.774 r270 top value=0.001uF
C28 "jc1.0" 0402 85.606,32.719 r270 top value=0.001uF
C29 "jc1.0" 0402 69.698,29.907 r270 top value=0.001uF
C30 "jc1.0" 0402 85.606,29.86 r270 top value=0.001uF
C31 "jc1.0" 0402 69.698,27.041 r270 top value=0.001uF
C32 "jc1.0" 0402 85.606,27 r270 top value=0.001uF
C33 "jc1.0" 0402 101.625,47.117 r270 top value=0.001uF
C34 "jc1.0" 0402 37.567,102.972 r270 top value=0.001uF
C35 "jc1.0" 0402 101.625,44.236 r270 top value=0.001uF
C36 "jc1.0" 0402 37.567,100.13 r270 top value=0.001uF
C37 "jc1.0" 0402 101.625,41.355 r270 top value=0.001uF
C38 "jc1.0" 0402 37.567,97.289 r270 top value=0.001uF
C39 "jc1.0" 0402 101.625,38.474 r270 top value=0.001uF
C40 "jc1.0" 0402 37.567,94.448 r270 top value=0.001uF
C41 "jc1.0" 0402 101.625,35.593 r270 top value=0.001uF
C42 "jc1.0" 0402 37.567,91.607 r270 top value=0.001uF
C43 "jc1.0" 0402 101.625,32.712 r270 top value=0.001uF
C44 "jc1.0" 0402 37.567,88.766 r270 top value=0.001uF
C45 "jc1.0" 0402 101.625,29.83 r270 top value=0.001uF
C46 "jc1.0" 0402 37.567,85.925 r270 top value=0.001uF
C47 "jc1.0" 0402 101.625,26.949 r270 top value=0.001uF
C48 "jc1.0" 0402 37.567,83.083 r270 top value=0.001uF
C49 "jc1.0" 0402 53.594,102.87 r270 top value=0.001uF
C50 "jc1.0" 0402 69.723,102.819 r270 top value=0.001uF
C51 "jc1.0" 0402 53.594,100.025 r270 top value=0.001uF
C52 "jc1.0" 0402 69.723,100.014 r270 top value=0.001uF
C53 "jc1.0" 0402 53.594,97.18 r270 top value=0.001uF
C54 "jc1.0" 0402 69.723,97.209 r270 top value=0.001uF
C55 "jc1.0" 0402 53.594,94.336 r270 top value=0.001uF
C56 "jc1.0" 0402 69.723,94.405 r270 top value=0.001uF
C57 "jc1.0" 0402 53.594,91.491 r270 top value=0.001uF
C58 "jc1.0" 0402 69.723,91.6 r270 top value=0.001uF
C59 "jc1.0" 0402 53.594,88.646 r270 top value=0.001uF
C60 "jc1.0" 0402 69.723,88.795 r270 top value=0.001uF
C61 "jc1.0" 0402 53.594,85.801 r270 top value=0.001uF
C62 "jc1.0" 0402 69.723,85.99 r270 top value=0.001uF
C63 "jc1.0" 0402 53.594,82.956 r270 top value=0.001uF
C64 "jc1.0" 0402 69.723,83.185 r270 top value=0.001uF
C65 "jc1.0" 0402 85.852,102.718 r270 top value=0.001uF
C66 "jc1.0" 0402 101.575,102.718 r270 top value=0.001uF
C67 "jc1.0" 0402 85.852,99.934 r270 top value=0.001uF
C68 "jc1.0" 0402 101.575,99.891 r270 top value=0.001uF
C69 "jc1.0" 0402 85.852,97.151 r270 top value=0.001uF
C70 "jc1.0" 0402 101.575,97.064 r270 top value=0.001uF
C71 "jc1.0" 0402 85.852,94.368 r270 top value=0.001uF
C72 "jc1.0" 0402 101.575,94.238 r270 top value=0.001uF
C73 "jc1.0" 0402 85.852,91.585 r270 top value=0.001uF
C74 "jc1.0" 0402 101.575,91.411 r270 top value=0.001uF
C75 "jc1.0" 0402 85.852,88.802 r270 top value=0.001uF
C76 "jc1.0" 0402 101.575,88.584 r270 top value=0.001uF
C77 "jc1.0" 0402 85.852,86.019 r270 top value=0.001uF
C78 "jc1.0" 0402 101.575,85.758 r270 top value=0.001uF
C79 "jc1.0" 0402 85.852,83.236 r270 top value=0.001uF
C80 "jc1.0" 0402 101.575,82.931 r270 top value=0.001uF
C81 "jc1.0" 0805 73.889,69.875 r270 bottom value=100uF
C82 "jc1.0" 0402 75.438,68.834 r270 bottom value=4.7uF
C83 "jc1.0" 0402 77.114,62.789 r270 bottom value=0.47uF
C84 "jc1.0" 0402 73.685,64.846 r270 bottom value=0.47uF
C85 "jc1.0" 0805 82.804,65.405 r270 bottom value=100uF
C86 "jc1.0" 0402 85.115,66.345 r270 bottom value=4.7uF
C87 "jc1.0" 0402 85.141,62.357 r270 bottom value=0.47uF
C88 "jc1.0" 0805 80.569,55.931 r180 bottom value=100uF
C89 "jc1.0" 0402 75.032,57.556 r180 bottom value=4.7uF
C90 "jc1.0" 0402 79.4,57.531 r180 bottom value=0.47uF
C91 "jc1.0" 0402 83.871,57.582 r180 bottom value=0.47uF
C92 "jc1.0" 0805 82.169,68.631 r180 bottom value=100uF
C93 "jc1.0" 0402 77.165,66.751 r90 bottom value=4.7uF
C94 "jc1.0" 0402 78.892,65.049 r0 bottom value=4.7uF
C95 "jc1.0" 0402 72.415,68.859 r270 bottom value=4.7uF
C96 "jc1.0" 0402 78.384,61.824 r90 bottom value=0.47uF
C97 "jc1.0" 0805 69.088,64.618 r270 bottom value=100uF
C98 "jc1.0" 0402 69.647,59.777 r90 bottom value=4.7uF
C99 "jc1.0" 0402 69.647,67.31 r270 bottom value=0.47uF
C100 "jc1.0" 0805 80.62,74.752 r180 bottom value=100uF
C101 "jc1.0" 0402 74.955,73.101 r180 bottom value=4.7uF
C102 "jc1.0" 0402 79.431,73.076 r180 bottom value=0.47uF
C103 "jc1.0" 0402 83.871,73.076 r180 bottom value=0.47uF
C104 "jc1.0" 0805 112.319,77.394 r90 bottom value=10uF@10V
C105 "jc1.0" 0805 114.605,77.394 r90 bottom value=0.1uF@10V
C112 "jc1.0" 0805 112.319,72.39 r90 bottom value=10uF
C113 "jc1.0" 0805 114.63,72.39 r90 bottom value=0.1uF
P1 "Header 8X2" HDR2X8 32,46 r270 top locked
P2 "Header 8X2" HDR2X8 48,46 r270 top locked
P3 "Header 8X2" HDR2X8 64,46 r270 top locked
P4 "Header 8X2" HDR2X8 80,46 r270 top locked
P5 "Header 8X2" HDR2X8 96,46 r270 top locked
P6 "Header 8X2" HDR2X8 32,102 r270 top locked
P7 "Header 8X2" HDR2X8 48,102 r270 top locked
P8 "Header 8X2" HDR2X8 64,102 r270 top locked
P9 "Header 8X2" HDR2X8 80.366,102 r270 top locked
P10 "Header 8X2" HDR2X8 96,102 r270 top locked
P11 "Header 13X2" HDR2X13 120,80 r270 top locked
P12 "Header 10X2" HDR2X10 31.725,77.419 r270 top locked
R1 "jr1.0" 0402 39.853,47.335 r90 top value=100ohm
R2 "jr1.0" 0402 55.804,47.107 r90 top value=100ohm
R3 "jr1.0" 0402 36.754,47.335 r90 top value=6.8kohm
R4 "jr1.0" 0402 38.82,47.335 r270 top value=NC
R5 "jr1.0" 0402 52.654,47.107 r90 top value=6.8kohm
R6 "jr1.0" 0402 54.754,47.107 r270 top value=NC
R7 "jr1.0" 0402 39.853,44.458 r90 top value=100ohm
R8 "jr1.0" 0402 55.804,44.24 r90 top value=100ohm
R9 "jr1.0" 0402 36.754,44.458 r90 top value=6.8kohm
R10 "jr1.0" 0402 38.82,44.458 r270 top value=NC
R11 "jr1.0" 0402 52.654,44.24 r90 top value=6.8kohm
R12 "jr1.0" 0402 54.754,44.24 r270 top value=NC
R13 "jr1.0" 0402 39.853,41.58 r90 top value=100ohm
R14 "jr1.0" 0402 55.804,41.373 r90 top value=100ohm
R15 "jr1.0" 0402 36.754,41.58 r90 top value=6.8kohm
R16 "jr1.0" 0402 38.82,41.58 r270 top value=NC
R17 "jr1.0" 0402 52.654,41.373 r90 top value=6.8kohm
R18 "jr1.0" 0402 54.754,41.373 r270 top value=NC
R19 "jr1.0" 0402 39.853,38.703 r90 top value=100ohm
R20 "jr1.0" 0402 55.804,38.507 r90 top value=100ohm
R21 "jr1.0" 0402 36.754,38.703 r90 top value=6.8kohm
R22 "jr1.0" 0402 38.82,38.703 r270 top value=NC
R23 "jr1.0" 0402 52.654,38.507 r90 top value=6.8kohm
R24 "jr1.0" 0402 54.754,38.507 r270 top value=NC
R25 "jr1.0" 0402 39.853,35.825 r90 top value=100ohm
R26 "jr1.0" 0402 55.804,35.64 r90 top value=100ohm
R27 "jr1.0" 0402 36.754,35.825 r90 top value=6.8kohm
R28 "jr1.0" 0402 38.82,35.825 r270 top value=NC
R29 "jr1.0" 0402 52.654,35.64 r90 top value=6.8kohm
R30 "jr1.0" 0402 54.754,35.64 r270 top value=NC
R31 "jr1.0" 0402 39.853,32.948 r90 top value=100ohm
R32 "jr1.0" 0402 55.804,32.774 r90 top value=100ohm
R33 "jr1.0" 0402 36.754,32.948 r90 top value=6.8kohm
R34 "jr1.0" 0402 38.82,32.948 r270 top value=NC
R35 "jr1.0" 0402 52.654,32.774 r90 top value=6.8kohm
R36 "jr1.0" 0402 54.754,32.774 r270 top value=NC
R37 "jr1.0" 0402 39.853,30.07 r90 top value=100ohm
R38 "jr1.0" 0402 55.804,29.907 r90 top value=100ohm
R39 "jr1.0" 0402 36.754,30.07 r90 top value=6.8kohm
R40 "jr1.0" 0402 38.82,30.07 r270 top value=NC
R41 "jr1.0" 0402 52.654,29.907 r90 top value=6.8kohm
R42 "jr1.0" 0402 54.754,29.907 r270 top value=NC
R43 "jr1.0" 0402 39.853,27.193 r90 top value=100ohm
R44 "jr1.0" 0402 55.804,27.041 r90 top value=100ohm
R45 "jr1.0" 0402 36.754,27.193 r90 top value=6.8kohm
R46 "jr1.0" 0402 38.82,27.193 r270 top value=NC
R47 "jr1.0" 0402 52.654,27.041 r90 top value=6.8kohm
R48 "jr1.0" 0402 54.754,27.041 r270 top value=NC
R49 "jr1.0" 0402 71.882,47.107 r90 top value=100ohm
R50 "jr1.0" 0402 87.808,47.015 r90 top value=100ohm
R51 "jr1.0" 0402 68.605,47.107 r90 top value=6.8kohm
R52 "jr1.0" 0402 70.79,47.107 r270 top value=NC
R53 "jr1.0" 0402 84.506,47.015 r90 top value=6.8kohm
R54 "jr1.0" 0402 86.707,47.015 r270 top value=NC
R55 "jr1.0" 0402 71.882,44.24 r90 top value=100ohm
R56 "jr1.0" 0402 87.808,44.156 r90 top value=100ohm
R57 "jr1.0" 0402 68.605,44.24 r90 top value=6.8kohm
R58 "jr1.0" 0402 70.79,44.24 r270 top value=NC
R59 "jr1.0" 0402 84.506,44.156 r90 top value=6.8kohm
R60 "jr1.0" 0402 86.707,44.156 r270 top value=NC
R61 "jr1.0" 0402 71.882,41.373 r90 top value=100ohm
R62 "jr1.0" 0402 87.808,41.297 r90 top value=100ohm
R63 "jr1.0" 0402 68.605,41.373 r90 top value=6.8kohm
R64 "jr1.0" 0402 70.79,41.373 r270 top value=NC
R65 "jr1.0" 0402 84.506,41.297 r90 top value=6.8kohm
R66 "jr1.0" 0402 86.707,41.297 r270 top value=NC
R67 "jr1.0" 0402 71.882,38.507 r90 top value=100ohm
R68 "jr1.0" 0402 87.808,38.437 r90 top value=100ohm
R69 "jr1.0" 0402 68.605,38.507 r90 top value=6.8kohm
R70 "jr1.0" 0402 70.79,38.507 r270 top value=NC
R71 "jr1.0" 0402 84.506,38.437 r90 top value=6.8kohm
R72 "jr1.0" 0402 86.707,38.437 r270 top value=NC
R73 "jr1.0" 0402 71.882,35.64 r90 top value=100ohm
R74 "jr1.0" 0402 87.808,35.578 r90 top value=100ohm
R75 "jr1.0" 0402 68.605,35.64 r90 top value=6.8kohm
R76 "jr1.0" 0402 70.79,35.64 r270 top value=NC
R77 "jr1.0" 0402 84.506,35.578 r90 top value=6.8kohm
R78 "jr1.0" 0402 86.707,35.578 r270 top value=NC
R79 "jr1.0" 0402 71.882,32.774 r90 top value=100ohm
R80 "jr1.0" 0402 87.808,32.719 r90 top value=100ohm
R81 "jr1.0" 0402 68.605,32.774 r90 top value=6.8kohm
R82 "jr1.0" 0402 70.79,32.774 r270 top value=NC
R83 "jr1.0" 0402 84.506,32.719 r90 top value=6.8kohm
R84 "jr1.0" 0402 86.707,32.719 r270 top value=NC
R85 "jr1.0" 0402 71.882,29.907 r90 top value=100ohm
R86 "jr1.0" 0402 87.808,29.86 r90 top value=100ohm
R87 "jr1.0" 0402 68.605,29.907 r90 top value=6.8kohm
R88 "jr1.0" 0402 70.79,29.907 r270 top value=NC
R89 "jr1.0" 0402 84.506,29.86 r90 top value=6.8kohm
R90 "jr1.0" 0402 86.707,29.86 r270 top value=NC
R91 "jr1.0" 0402 71.882,27.041 r90 top value=100ohm
R92 "jr1.0" 0402 87.808,27 r90 top value=100ohm
R93 "jr1.0" 0402 68.605,27.041 r90 top value=6.8kohm
R94 "jr1.0" 0402 70.79,27.041 r270 top value=NC
R95 "jr1.0" 0402 84.506,27 r90 top value=6.8kohm
R96 "jr1.0" 0402 86.707,27 r270 top value=NC
R97 "jr1.0" 0402 103.708,47.117 r90 top value=100ohm
R98 "jr1.0" 0402 39.599,102.972 r90 top value=100ohm
R99 "jr1.0" 0402 100.584,47.117 r90 top value=6.8kohm
R100 "jr1.0" 0402 102.667,47.117 r270 top value=NC
R101 "jr1.0" 0402 36.551,102.972 r90 top value=6.8kohm
R102 "jr1.0" 0402 38.583,102.972 r270 top value=NC
R103 "jr1.0" 0402 103.708,44.236 r90 top value=100ohm
R104 "jr1.0" 0402 39.599,100.13 r90 top value=100ohm
R105 "jr1.0" 0402 100.584,44.236 r90 top value=6.8kohm
R106 "jr1.0" 0402 102.667,44.236 r270 top value=NC
R107 "jr1.0" 0402 36.551,100.13 r90 top value=6.8kohm
R108 "jr1.0" 0402 38.583,100.13 r270 top value=NC
R109 "jr1.0" 0402 103.708,41.355 r90 top value=100ohm
R110 "jr1.0" 0402 39.599,97.289 r90 top value=100ohm
R111 "jr1.0" 0402 100.584,41.355 r90 top value=6.8kohm
R112 "jr1.0" 0402 102.667,41.355 r270 top value=NC
R113 "jr1.0" 0402 36.551,97.289 r90 top value=6.8kohm
R114 "jr1.0" 0402 38.583,97.289 r270 top value=NC
R115 "jr1.0" 0402 103.708,38.474 r90 top value=100ohm
R116 "jr1.0" 0402 39.599,94.448 r90 top value=100ohm
R117 "jr1.0" 0402 100.584,38.474 r90 top value=6.8kohm
R118 "jr1.0" 0402 102.667,38.474 r270 top value=NC
R119 "jr1.0" 0402 36.551,94.448 r90 top value=6.8kohm
R120 "jr1.0" 0402 38.583,94.448 r270 top value=NC
R121 "jr1.0" 0402 103.708,35.593 r90 top value=100ohm
R122 "jr1.0" 0402 39.599,91.607 r90 top value=100ohm
R123 "jr1.0" 0402 100.584,35.593 r90 top value=6.8kohm
R124 "jr1.0" 0402 102.667,35.593 r270 top value=NC
R125 "jr1.0" 0402 36.551,91.607 r90 top value=6.8kohm
R126 "jr1.0" 0402 38.583,91.607 r270 top value=NC
R127 "jr1.0" 0402 103.708,32.712 r90 top value=100ohm
R128 "jr1.0" 0402 39.599,88.766 r90 top value=100ohm
R129 "jr1.0" 0402 100.584,32.712 r90 top value=6.8kohm
R130 "jr1.0" 0402 102.667,32.712 r270 top value=NC
R131 "jr1.0" 0402 36.551,88.766 r90 top value=6.8kohm
R132 "jr1.0" 0402 38.583,88.766 r270 top value=NC
R133 "jr1.0" 0402 103.708,29.83 r90 top value=100ohm
R134 "jr1.0" 0402 39.599,85.925 r90 top value=100ohm
R135 "jr1.0" 0402 100.584,29.83 r90 top value=6.8kohm
R136 "jr1.0" 0402 102.667,29.83 r270 top value=NC
R137 "jr1.0" 0402 36.551,85.925 r90 top value=6.8kohm
R138 "jr1.0" 0402 38.583,85.925 r270 top value=NC
R139 "jr1.0" 0402 103.708,26.949 r90 top value=100ohm
R140 "jr1.0" 0402 39.599,83.083 r90 top value=100ohm
R141 "jr1.0" 0402 100.584,26.949 r90 top value=6.8kohm
R142 "jr1.0" 0402 102.667,26.949 r270 top value=NC
R143 "jr1.0" 0402 36.551,83.083 r90 top value=6.8kohm
R144 "jr1.0" 0402 38.583,83.083 r270 top value=NC
R145 "jr1.0" 0402 55.626,102.87 r90 top value=100ohm
R146 "jr1.0" 0402 71.806,102.819 r90 top value=100ohm
R147 "jr1.0" 0402 52.578,102.87 r90 top value=6.8kohm
R148 "jr1.0" 0402 54.61,102.87 r270 top value=NC
R149 "jr1.0" 0402 68.682,102.819 r90 top value=6.8kohm
R150 "jr1.0" 0402 70.764,102.819 r270 top value=NC
R151 "jr1.0" 0402 55.626,100.025 r90 top value=100ohm
R152 "jr1.0" 0402 71.806,100.014 r90 top value=100ohm
R153 "jr1.0" 0402 52.578,100.025 r90 top value=6.8kohm
R154 "jr1.0" 0402 54.61,100.025 r270 top value=NC
R155 "jr1.0" 0402 68.682,100.014 r90 top value=6.8kohm
R156 "jr1.0" 0402 70.764,100.014 r270 top value=NC
R157 "jr1.0" 0402 55.626,97.18 r90 top value=100ohm
R158 "jr1.0" 0402 71.806,97.209 r90 top value=100ohm
R159 "jr1.0" 0402 52.578,97.18 r90 top value=6.8kohm
R160 "jr1.0" 0402 54.61,97.18 r270 top value=NC
R161 "jr1.0" 0402 68.682,97.209 r90 top value=6.8kohm
R162 "jr1.0" 0402 70.764,97.209 r270 top value=NC
R163 "jr1.0" 0402 55.626,94.336 r90 top value=100ohm
R164 "jr1.0" 0402 71.806,94.405 r90 top value=100ohm
R165 "jr1.0" 0402 52.578,94.336 r90 top value=6.8kohm
R166 "jr1.0" 0402 54.61,94.336 r270 top value=NC
R167 "jr1.0" 0402 68.682,94.405 r90 top value=6.8kohm
R168 "jr1.0" 0402 70.764,94.405 r270 top value=NC
R169 "jr1.0" 0402 55.626,91.491 r90 top value=100ohm
R170 "jr1.0" 0402 71.806,91.6 r90 top value=100ohm
R171 "jr1.0" 0402 52.578,91.491 r90 top value=6.8kohm
R172 "jr1.0" 0402 54.61,91.491 r270 top value=NC
R173 "jr1.0" 0402 68.682,91.6 r90 top value=6.8kohm
R174 "jr1.0" 0402 70.764,91.6 r270 top value=NC
R175 "jr1.0" 0402 55.626,88.646 r90 top value=100ohm
R176 "jr1.0" 0402 71.806,88.795 r90 top value=100ohm
R177 "jr1.0" 0402 52.578,88.646 r90 top value=6.8kohm
R178 "jr1.0" 0402 54.61,88.646 r270 top value=NC
R179 "jr1.0" 0402 68.682,88.795 r90 top value=6.8kohm
R180 "jr1.0" 0402 70.764,88.795 r270 top value=NC
R181 "jr1.0" 0402 55.626,85.801 r90 top value=100ohm
R182 "jr1.0" 0402 71.806,85.99 r90 top value=100ohm
R183 "jr1.0" 0402 52.578,85.801 r90 top value=6.8kohm
R184 "jr1.0" 0402 54.61,85.801 r270 top value=NC
R185 "jr1.0" 0402 68.682,85.99 r90 top value=6.8kohm
R186 "jr1.0" 0402 70.764,85.99 r270 top value=NC
R187 "jr1.0" 0402 55.626,82.956 r90 top value=100ohm
R188 "jr1.0" 0402 71.806,83.185 r90 top value=100ohm
R189 "jr1.0" 0402 52.578,82.956 r90 top value=6.8kohm
R190 "jr1.0" 0402 54.61,82.956 r270 top value=NC
R191 "jr1.0" 0402 68.682,83.185 r90 top value=6.8kohm
R192 "jr1.0" 0402 70.764,83.185 r270 top value=NC
R193 "jr1.0" 0402 87.935,102.718 r90 top value=100ohm
R194 "jr1.0" 0402 103.607,102.718 r90 top value=100ohm
R195 "jr1.0" 0402 84.811,102.718 r90 top value=6.8kohm
R196 "jr1.0" 0402 86.893,102.718 r270 top value=NC
R197 "jr1.0" 0402 100.559,102.718 r90 top value=6.8kohm
R198 "jr1.0" 0402 102.591,102.718 r270 top value=NC
R199 "jr1.0" 0402 87.935,99.934 r90 top value=100ohm
R200 "jr1.0" 0402 103.607,99.891 r90 top value=100ohm
R201 "jr1.0" 0402 84.811,99.934 r90 top value=6.8kohm
R202 "jr1.0" 0402 86.893,99.934 r270 top value=NC
R203 "jr1.0" 0402 100.559,99.891 r90 top value=6.8kohm
R204 "jr1.0" 0402 102.591,99.891 r270 top value=NC
R205 "jr1.0" 0402 87.935,97.151 r90 top value=100ohm
R206 "jr1.0" 0402 103.607,97.064 r90 top value=100ohm
R207 "jr1.0" 0402 84.811,97.151 r90 top value=6.8kohm
R208 "jr1.0" 0402 86.893,97.151 r270 top value=NC
R209 "jr1.0" 0402 100.559,97.064 r90 top value=6.8kohm
R210 "jr1.0" 0402 102.591,97.064 r270 top value=NC
R211 "jr1.0" 0402 87.935,94.368 r90 top value=100ohm
R212 "jr1.0" 0402 103.607,94.238 r90 top value=100ohm
R213 "jr1.0" 0402 84.811,94.368 r90 top value=6.8kohm
R214 "jr1.0" 0402 86.893,94.368 r270 top value=NC
R215 "jr1.0" 0402 100.559,94.238 r90 top value=6.8kohm
R216 "jr1.0" 0402 102.591,94.238 r270 top value=NC
R217 "jr1.0" 0402 87.935,91.585 r90 top value=100ohm
R218 "jr1.0" 0402 103.607,91.411 r90 top value=100ohm
R219 "jr1.0" 0402 84.811,91.585 r90 top value=6.8kohm
R220 "jr1.0" 0402 86.893,91.585 r270 top value=NC
R221 "jr1.0" 0402 100.559,91.411 r90 top value=6.8kohm
R222 "jr1.0" 0402 102.591,91.411 r270 top value=NC
R223 "jr1.0" 0402 87.935,88.802 r90 top value=100ohm
R224 "jr1.0" 0402 103.607,88.584 r90 top value=100ohm
R225 "jr1.0" 0402 84.811,88.802 r90 top value=6.8kohm
R226 "jr1.0" 0402 86.893,88.802 r270 top value=NC
R227 "jr1.0" 0402 100.559,88.584 r90 top value=6.8kohm
R228 "jr1.0" 0402 102.591,88.584 r270 top value=NC
R229 "jr1.0" 0402 87.935,86.019 r90 top value=100ohm
R230 "jr1.0" 0402 103.607,85.758 r90 top value=100ohm
R231 "jr1.0" 0402 84.811,86.019 r90 top value=6.8kohm
R232 "jr1.0" 0402 86.893,86.019 r270 top value=NC
R233 "jr1.0" 0402 100.559,85.758 r90 top value=6.8kohm
R234 "jr1.0" 0402 102.591,85.758 r270 top value=NC
R235 "jr1.0" 0402 87.935,83.236 r90 top value=100ohm
R236 "jr1.0" 0402 103.607,82.931 r90 top value=100ohm
R237 "jr1.0" 0402 84.811,83.236 r90 top value=6.8kohm
R238 "jr1.0" 0402 86.893,83.236 r270 top value=NC
R239 "jr1.0" 0402 100.559,82.931 r90 top value=6.8kohm
R240 "jr1.0" 0402 102.591,82.931 r270 top value=NC
U1 "XC6SLX9-2FTG256C" FTG256 77.418,65.321 r90 top locked

## Footprints (in the part's own frame and the unit in brackets; to place one, negate y for a bottom-side part, rotate by r counter-clockwise, add the part's x,y. Pads: shape width x height; smd on the part's side, far side on the other; paste and mask are expansions set on the pad)
0402 [mm] "Chip Capacitor; Body 1.0 x 0.5 mm (LxW typ)"
  rect 0.9x0.7 smd: 1(-0.65,0) 2(0.65,0)
0805 [mil]
  rect 60x50 smd: 1(0,0) 2(90,0)
  silkscreen extent -50,-40 135,40
FTG256 [mm] "BGA, 256-Leads, Body 17x17mm, Pitch 1mm"
  round 0.45 smd: A1(-7.5,7.5) A2(-6.5,7.5) A3(-5.5,7.5) A4(-4.5,7.5) A5(-3.5,7.5) A6(-2.5,7.5) A7(-1.5,7.5) A8(-0.5,7.5) A9(0.5,7.5) A10(1.5,7.5) A11(2.5,7.5) A12(3.5,7.5) A13(4.5,7.5) A14(5.5,7.5) A15(6.5,7.5) A16(7.5,7.5) B1(-7.5,6.5) B2(-6.5,6.5) B3(-5.5,6.5) B4(-4.5,6.5) B5(-3.5,6.5) B6(-2.5,6.5) B7(-1.5,6.5) B8(-0.5,6.5) B9(0.5,6.5) B10(1.5,6.5) B11(2.5,6.5) B12(3.5,6.5) B13(4.5,6.5) B14(5.5,6.5) B15(6.5,6.5) B16(7.5,6.5) C1(-7.5,5.5) C2(-6.5,5.5) C3(-5.5,5.5) C4(-4.5,5.5) C5(-3.5,5.5) C6(-2.5,5.5) C7(-1.5,5.5) C8(-0.5,5.5) C9(0.5,5.5) C10(1.5,5.5) C11(2.5,5.5) C12(3.5,5.5) C13(4.5,5.5) C14(5.5,5.5) C15(6.5,5.5) C16(7.5,5.5) D1(-7.5,4.5) D2(-6.5,4.5) D3(-5.5,4.5) D4(-4.5,4.5) D5(-3.5,4.5) D6(-2.5,4.5) D7(-1.5,4.5) D8(-0.5,4.5) D9(0.5,4.5) D10(1.5,4.5) D11(2.5,4.5) D12(3.5,4.5) D13(4.5,4.5) D14(5.5,4.5) D15(6.5,4.5) D16(7.5,4.5) E1(-7.5,3.5) E2(-6.5,3.5) E3(-5.5,3.5) E4(-4.5,3.5) E5(-3.5,3.5) E6(-2.5,3.5) E7(-1.5,3.5) E8(-0.5,3.5) E9(0.5,3.5) E10(1.5,3.5) E11(2.5,3.5) E12(3.5,3.5) E13(4.5,3.5) E14(5.5,3.5) E15(6.5,3.5) E16(7.5,3.5) F1(-7.5,2.5) F2(-6.5,2.5) F3(-5.5,2.5) F4(-4.5,2.5) F5(-3.5,2.5) F6(-2.5,2.5) F7(-1.5,2.5) F8(-0.5,2.5) F9(0.5,2.5) F10(1.5,2.5) F11(2.5,2.5) F12(3.5,2.5) F13(4.5,2.5) F14(5.5,2.5) F15(6.5,2.5) F16(7.5,2.5) G1(-7.5,1.5) G2(-6.5,1.5) G3(-5.5,1.5) G4(-4.5,1.5) G5(-3.5,1.5) G6(-2.5,1.5) G7(-1.5,1.5) G8(-0.5,1.5) G9(0.5,1.5) G10(1.5,1.5) G11(2.5,1.5) G12(3.5,1.5) G13(4.5,1.5) G14(5.5,1.5) G15(6.5,1.5) G16(7.5,1.5) H1(-7.5,0.5) H2(-6.5,0.5) H3(-5.5,0.5) H4(-4.5,0.5) H5(-3.5,0.5) H6(-2.5,0.5) H7(-1.5,0.5) H8(-0.5,0.5) H9(0.5,0.5) H10(1.5,0.5) H11(2.5,0.5) H12(3.5,0.5) H13(4.5,0.5) H14(5.5,0.5) H15(6.5,0.5) H16(7.5,0.5) J1(-7.5,-0.5) J2(-6.5,-0.5) J3(-5.5,-0.5) J4(-4.5,-0.5) J5(-3.5,-0.5) J6(-2.5,-0.5) J7(-1.5,-0.5) J8(-0.5,-0.5) J9(0.5,-0.5) J10(1.5,-0.5) J11(2.5,-0.5) J12(3.5,-0.5) J13(4.5,-0.5) J14(5.5,-0.5) J15(6.5,-0.5) J16(7.5,-0.5) K1(-7.5,-1.5) K2(-6.5,-1.5) K3(-5.5,-1.5) K4(-4.5,-1.5) K5(-3.5,-1.5) K6(-2.5,-1.5) K7(-1.5,-1.5) K8(-0.5,-1.5) K9(0.5,-1.5) K10(1.5,-1.5) K11(2.5,-1.5) K12(3.5,-1.5) K13(4.5,-1.5) K14(5.5,-1.5) K15(6.5,-1.5) K16(7.5,-1.5) L1(-7.5,-2.5) L2(-6.5,-2.5) L3(-5.5,-2.5) L4(-4.5,-2.5) L5(-3.5,-2.5) L6(-2.5,-2.5) L7(-1.5,-2.5) L8(-0.5,-2.5) L9(0.5,-2.5) L10(1.5,-2.5) L11(2.5,-2.5) L12(3.5,-2.5) L13(4.5,-2.5) L14(5.5,-2.5) L15(6.5,-2.5) L16(7.5,-2.5) M1(-7.5,-3.5) M2(-6.5,-3.5) M3(-5.5,-3.5) M4(-4.5,-3.5) M5(-3.5,-3.5) M6(-2.5,-3.5) M7(-1.5,-3.5) M8(-0.5,-3.5) M9(0.5,-3.5) M10(1.5,-3.5) M11(2.5,-3.5) M12(3.5,-3.5) M13(4.5,-3.5) M14(5.5,-3.5) M15(6.5,-3.5) M16(7.5,-3.5) N1(-7.5,-4.5) N2(-6.5,-4.5) N3(-5.5,-4.5) N4(-4.5,-4.5) N5(-3.5,-4.5) N6(-2.5,-4.5) N7(-1.5,-4.5) N8(-0.5,-4.5) N9(0.5,-4.5) N10(1.5,-4.5) N11(2.5,-4.5) N12(3.5,-4.5) N13(4.5,-4.5) N14(5.5,-4.5) N15(6.5,-4.5) N16(7.5,-4.5) P1(-7.5,-5.5) P2(-6.5,-5.5) P3(-5.5,-5.5) P4(-4.5,-5.5) P5(-3.5,-5.5) P6(-2.5,-5.5) P7(-1.5,-5.5) P8(-0.5,-5.5) P9(0.5,-5.5) P10(1.5,-5.5) P11(2.5,-5.5) P12(3.5,-5.5) P13(4.5,-5.5) P14(5.5,-5.5) P15(6.5,-5.5) P16(7.5,-5.5) R1(-7.5,-6.5) R2(-6.5,-6.5) R3(-5.5,-6.5) R4(-4.5,-6.5) R5(-3.5,-6.5) R6(-2.5,-6.5) R7(-1.5,-6.5) R8(-0.5,-6.5) R9(0.5,-6.5) R10(1.5,-6.5) R11(2.5,-6.5) R12(3.5,-6.5) R13(4.5,-6.5) R14(5.5,-6.5) R15(6.5,-6.5) R16(7.5,-6.5) T1(-7.5,-7.5) T2(-6.5,-7.5) T3(-5.5,-7.5) T4(-4.5,-7.5) T5(-3.5,-7.5) T6(-2.5,-7.5) T7(-1.5,-7.5) T8(-0.5,-7.5) T9(0.5,-7.5) T10(1.5,-7.5) T11(2.5,-7.5) T12(3.5,-7.5) T13(4.5,-7.5) T14(5.5,-7.5) T15(6.5,-7.5) T16(7.5,-7.5)
  silkscreen extent -9.27,-8.5 8.5,8.5, body extent -8.5,-8.5 8.5,8.5, height 1.55
HDR2X8 [mm] "Connector; Header; 8x2 Position"
  rect 1.5x1.5 hole 0.9: 1(0,0)
  round 1.5 hole 0.9: 2(0,2.54) 3(2.54,0) 4(2.54,2.54) 5(5.08,0) 6(5.08,2.54) 7(7.62,0) 8(7.62,2.54) 9(10.16,0) 10(10.16,2.54) 11(12.7,0) 12(12.7,2.54) 13(15.24,0) 14(15.24,2.54) 15(17.78,0) 16(17.78,2.54)
  silkscreen extent -1.27,-1.27 19.05,3.81
HDR2X10 [mm] "Connector; Header; 10x2 Position"
  rect 1.5x1.5 hole 0.9: 1(0,0)
  round 1.5 hole 0.9: 2(0,2.54) 3(2.54,0) 4(2.54,2.54) 5(5.08,0) 6(5.08,2.54) 7(7.62,0) 8(7.62,2.54) 9(10.16,0) 10(10.16,2.54) 11(12.7,0) 12(12.7,2.54) 13(15.24,0) 14(15.24,2.54) 15(17.78,0) 16(17.78,2.54) 17(20.32,0) 18(20.32,2.54) 19(22.86,0) 20(22.86,2.54)
  silkscreen extent -1.27,-1.27 24.13,3.81
HDR2X13 [mm] "Connector; Header; 13x2 Position"
  rect 1.5x1.5 hole 0.9: 1(0,0)
  round 1.5 hole 0.9: 2(0,2.54) 3(2.54,0) 4(2.54,2.54) 5(5.08,0) 6(5.08,2.54) 7(7.62,0) 8(7.62,2.54) 9(10.16,0) 10(10.16,2.54) 11(12.7,0) 12(12.7,2.54) 13(15.24,0) 14(15.24,2.54) 15(17.78,0) 16(17.78,2.54) 17(20.32,0) 18(20.32,2.54) 19(22.86,0) 20(22.86,2.54) 21(25.4,0) 22(25.4,2.54) 23(27.94,0) 24(27.94,2.54) 25(30.48,0) 26(30.48,2.54)
  silkscreen extent -1.27,-1.27 31.75,3.81

## Part data
C1 C2 C3 C4 C5 C6 C7 C8 C9 C10 C11 C12 C13 C14 C15 C16 C17 C18 C19 C20 C21 C22 C23 C24 C25 C26 C27 C28 C29 C30 C31 C32 C33 C34 C35 C36 C37 C38 C39 C40 C41 C42 C43 C44 C45 C46 C47 C48 C49 C50 C51 C52 C53 C54 C55 C56 C57 C58 C59 C60 C61 C62 C63 C64 C65 C66 C67 C68 C69 C70 C71 C72 C73 C74 C75 C76 C77 C78 C79 C80 C81 C82 C83 C84 C85 C86 C87 C88 C89 C90 C91 C92 C93 C94 C95 C96 C97 C98 C99 C100 C101 C102 C103 C104 C105 C112 C113: library part Cap, "Capacitor", LatestRevisionDate=17-Jul-2002, LatestRevisionNote="Re-released for DXP Platform.", PackageReference=RAD-0.3, Published=8-Jun-2000, Publisher="Altium Limited"
P1 P2 P3 P4 P5 P6 P7 P8 P9 P10: "Header, 8-Pin, Dual row", LatestRevisionDate=17-Jul-2002, LatestRevisionNote="Re-released for DXP Platform.", Publisher="Altium Limited"
P11: "Header, 13-Pin, Dual row", LatestRevisionDate=17-Jul-2002, LatestRevisionNote="Re-released for DXP Platform.", Publisher="Altium Limited"
P12: "Header, 10-Pin, Dual row", LatestRevisionDate=17-Jul-2002, LatestRevisionNote="Re-released for DXP Platform.", Publisher="Altium Limited"
R1 R2 R3 R4 R5 R6 R7 R8 R9 R10 R11 R12 R13 R14 R15 R16 R17 R18 R19 R20 R21 R22 R23 R24 R25 R26 R27 R28 R29 R30 R31 R32 R33 R34 R35 R36 R37 R38 R39 R40 R41 R42 R43 R44 R45 R46 R47 R48 R49 R50 R51 R52 R53 R54 R55 R56 R57 R58 R59 R60 R61 R62 R63 R64 R65 R66 R67 R68 R69 R70 R71 R72 R73 R74 R75 R76 R77 R78 R79 R80 R81 R82 R83 R84 R85 R86 R87 R88 R89 R90 R91 R92 R93 R94 R95 R96 R97 R98 R99 R100 R101 R102 R103 R104 R105 R106 R107 R108 R109 R110 R111 R112 R113 R114 R115 R116 R117 R118 R119 R120 R121 R122 R123 R124 R125 R126 R127 R128 R129 R130 R131 R132 R133 R134 R135 R136 R137 R138 R139 R140 R141 R142 R143 R144 R145 R146 R147 R148 R149 R150 R151 R152 R153 R154 R155 R156 R157 R158 R159 R160 R161 R162 R163 R164 R165 R166 R167 R168 R169 R170 R171 R172 R173 R174 R175 R176 R177 R178 R179 R180 R181 R182 R183 R184 R185 R186 R187 R188 R189 R190 R191 R192 R193 R194 R195 R196 R197 R198 R199 R200 R201 R202 R203 R204 R205 R206 R207 R208 R209 R210 R211 R212 R213 R214 R215 R216 R217 R218 R219 R220 R221 R222 R223 R224 R225 R226 R227 R228 R229 R230 R231 R232 R233 R234 R235 R236 R237 R238 R239 R240: library part Res, "Resistor", LatestRevisionDate=04-Mar-2005, LatestRevisionNote="PCB Footprint replaced.", PackageReference=J1-0603, Published=8-Jun-2000, Publisher="Altium Limited"
U1: "Spartan-6 LX 1.2V FPGA, 186 User I/Os, 256-Ball Fine-Pitch Thin BGA (1.0mm Pitch), Speed Grade 2, Commercial Grade, Pb-Free", Code_JEDEC=MS-034-AAF-1*, ComponentLink1Description="Manufacturer URL", ComponentLink1URL=http://www.xilinx.com/, ComponentLink2Description="Spartan-6 Datasheet", ComponentLink2URL=http://www.xilinx.com/support/documentation/data_sheets/ds160.pdf, ComponentLink3Description="Spartan-6 Documents", ComponentLink3URL=http://www.xilinx.com/support/documentation/spartan-6.htm, DatasheetVersion="ver1.6, Nov-2010", PackageDescription="256-Ball Fine Pitch Thin Ball Grid Array 1.00 mm Pitch (FTG256) - Pb-Free", PackageReference=FTG256, PackageVersion="ver1.3, Oct-2007"

## Free pads (board coordinates)
  round 4 hole 2.5: 0(23,28) 0(23,45) 0(23,85) 0(23,102) 0(111,28) 0(111,45) 0(111,85) 0(111,102)

## Via types
v1: diameter 0.305, hole 0.152, Top Layer to Bottom Layer, 385 vias

## Nets (pads, with @x,y where several pads share a name; then routed paths per layer and width w, separated by ;. In a path a pad name is that pad's centre, name@x,y a point inside that pad or via, vN(x,y) a via of type N, cw(c..) or ccw(c..) an arc to the next point about the centre after c; other vN are vias at no path point)
+1.2V: C88.2 C89.2 C90.2 C91.2 C92.2 C93.2 C94.2 C95.2 C96.2 C97.2 C98.2 C99.2 C100.2 C101.2 C102.2 C103.2 P11.9 P11.10 U1.B4 U1.B9 U1.B13 U1.D2 U1.D7 U1.D10 U1.D15 U1.G4 U1.G7 U1.G9 U1.G13 U1.H8 U1.H10 U1.J2 U1.J7 U1.J9 U1.J15 U1.K4 U1.K8 U1.K10 U1.K13 U1.N2 U1.N15 U1.R13 | length 35.5
  Top Layer w0.254: v1(70.409,61.316) 70.423,61.316 U1.B4@70.918,60.821 ; v1(70.409,66.319) 70.907,65.821 U1.B9@70.918,65.821 ; v1(70.409,70.307) 70.431,70.307 U1.B13@70.918,69.821 ; v1(72.411,64.314) 72.425,64.314 U1.D7@72.918,63.821 ; v1(72.423,67.31) 72.912,66.821 U1.D10@72.918,66.821 ; U1.D2@72.918,58.821 73.42,58.318 v1(73.431,58.318) ; U1.D15@72.918,71.821 73.406,72.309 v1(73.406,72.314) ; v1(75.411,63.322) 75.909,63.821 U1.G7@75.918,63.821 ; v1(75.413,61.316) 75.907,60.821 U1.G4@75.918,60.821 ; v1(75.413,66.318) 75.42,66.318 U1.G9@75.918,65.821 ; U1.G13@75.918,69.821 v1(76.403,70.307) ; v1(76.429,64.314) 76.918,64.803 U1.H8@76.918,64.821 ; v1(76.429,67.31) U1.H10@76.918,66.821 ; U1.J2@77.918,58.821 78.41,58.329 v1(78.41,58.318) ; U1.J7@77.918,63.821 78.41,63.329 v1(78.41,63.322) ; U1.J9@77.918,65.821 78.41,66.313 v1(78.41,66.319) ; U1.J15@77.918,71.821 v1(78.41,72.314) ; v1(78.41,70.307) 78.431,70.307 U1.K13@78.918,69.821 ; U1.K4@78.918,60.821 78.924,60.821 v1(79.42,60.325) ; U1.K8@78.918,64.821 79.416,64.322 v1(79.416,64.314) ; U1.K10@78.918,66.821 78.931,66.821 v1(79.42,67.31) ; U1.N2@81.918,58.821 81.921,58.821 v1(82.423,58.318) ; U1.N15@81.918,71.821 81.93,71.821 v1(82.423,72.314) ; U1.R13@83.918,69.821 83.93,69.821 v1(84.416,70.307)
  Bottom Layer w0.254: C97.2@69.088,61.976 69.647,61.417 ; C98.2@69.647,60.427 69.647,61.417 ; C99.2@69.647,66.66 69.987,66.319 v1(70.409,66.319) ; v1(70.409,61.316) 69.748,61.316 69.647,61.417 ; C95.2@72.415,68.209 72.423,68.202 v1(72.423,67.31) ; v1(73.406,72.314) 74.193,73.101 C101.2@74.305,73.101 ; v1(73.431,58.318) 74.193,57.556 C89.2@74.382,57.556 ; v1(76.429,67.31) 77.074,67.31 C93.2@77.165,67.401 ; C88.2@78.283,55.931 78.75,56.398 C90.2@78.75,57.531 78.41,57.872 v1(78.41,58.318) ; C100.2@78.334,74.752 78.781,74.304 C102.2@78.781,73.076 78.41,72.704 v1(78.41,72.314) ; C96.2@78.384,62.474 78.41,62.499 v1(78.41,63.322) ; v1(79.416,64.314) 79.416,64.923 C94.2@79.542,65.049 ; v1(79.42,67.31) 79.42,68.168 C92.2@79.883,68.631 ; v1(82.423,58.318) 83.16,57.582 C91.2@83.221,57.582 ; v1(82.423,72.314) 82.459,72.314 C103.2@83.221,73.076
+1V: C112.2 C113.2 P11.5 P11.6 R1.2 R2.2 R7.2 R8.2 R13.2 R14.2 R19.2 R20.2 R25.2 R26.2 R31.2 R32.2 R37.2 R38.2 R43.2 R44.2 R49.2 R50.2 R55.2 R56.2 R61.2 R62.2 R67.2 R68.2 R73.2 R74.2 R79.2 R80.2 R85.2 R86.2 R91.2 R92.2 R97.2 R98.2 R103.2 R104.2 R109.2 R110.2 R115.2 R116.2 R121.2 R122.2 R127.2 R128.2 R133.2 R134.2 R139.2 R140.2 R145.2 R146.2 R151.2 R152.2 R157.2 R158.2 R163.2 R164.2 R169.2 R170.2 R175.2 R176.2 R181.2 R182.2 R187.2 R188.2 R193.2 R194.2 R199.2 R200.2 R205.2 R206.2 R211.2 R212.2 R217.2 R218.2 R223.2 R224.2 R229.2 R230.2 R235.2 R236.2 | length 10.3
  Bottom Layer w0.762: C112.2@112.319,74.676 C113.2@114.63,74.676 114.874,74.92 P11.6@122.54,74.92
  other v1: 87.782,27.61 103.683,27.635 71.882,27.686 55.804,27.711 39.853,27.838 87.782,30.48 103.683,30.48 55.804,30.531 71.882,30.556 39.853,30.734 87.782,33.35 103.683,33.376 55.804,33.426 71.882,33.426 39.853,33.579 87.732,36.22 103.683,36.246 71.882,36.271 55.804,36.322 39.853,36.5 87.732,39.091 103.683,39.116 55.804,39.167 71.882,39.167 39.853,39.345 87.757,41.961 103.683,42.012 55.804,42.037 71.882,42.037 39.853,42.24 87.782,44.806 103.683,44.882 55.804,44.907 71.882,44.907 39.853,45.11 87.757,47.65 71.907,47.752 55.804,47.777 103.683,47.777 39.853,47.981 55.626,83.591 103.607,83.591 39.624,83.744 71.806,83.845 87.935,83.845 103.607,86.411 55.626,86.462 39.599,86.589 71.806,86.589 87.935,86.665 103.581,89.23 55.626,89.3 39.599,89.408 71.806,89.408 87.935,89.408 103.581,92.075 55.626,92.151 39.599,92.253 71.806,92.253 87.935,92.253 103.581,94.869 55.626,94.971 87.935,95.021 39.599,95.098 71.806,95.098 103.581,97.714 87.935,97.79 55.626,97.841 71.806,97.841 39.599,97.968 87.935,100.584 103.581,100.584 55.626,100.686 71.806,100.686 39.599,100.787 87.935,103.378 103.556,103.378 71.806,103.454 55.626,103.53 39.599,103.632
+3.3V: C81.2 C82.2 C83.2 C84.2 C85.2 C86.2 C87.2 P11.11 P11.12 U1.E5 U1.F8 U1.F11 U1.G10 U1.H6 U1.J10 U1.L6 U1.L9 U1.N7 U1.N10 U1.R4 U1.R8 | length 15.8
  Top Layer w0.254: U1.E5@73.918,61.821 v1(74.422,61.316) ; v1(74.422,64.313) 74.918,64.809 U1.F8@74.918,64.821 ; U1.F11@74.918,67.83 U1.F11@74.918,67.821 74.918,67.803 v1(75.411,67.31) 75.9,66.821 U1.G10@75.918,66.821 ; v1(76.429,62.332) U1.H6@76.918,62.821 ; U1.J10@77.918,66.821 77.921,66.821 v1(78.41,67.31) ; U1.L6@79.918,62.821 80.416,62.322 v1(80.416,62.306) ; U1.L9@79.918,65.821 79.918,65.825 v1(80.411,66.318) ; v1(81.407,63.322) 81.419,63.322 U1.N7@81.918,63.821 ; U1.N10@81.918,66.821 82.398,67.301 v1(82.398,67.31) ; U1.R4@83.918,60.821 83.918,60.829 v1(84.404,61.316) ; U1.R8@83.918,64.821 83.934,64.821 v1(84.416,65.303)
  Bottom Layer w0.254: C84.2@73.685,64.196 73.802,64.313 v1(74.422,64.313) ; C81.2@73.889,67.589 74.168,67.31 v1(75.411,67.31) 75.411,68.157 C82.2@75.438,68.184 ; v1(76.429,62.332) 76.922,62.332 C83.2@77.114,62.139 ; v1(81.407,63.322) 82.601,63.322 C85.2@82.804,63.119 ; v1(84.404,61.316) 84.749,61.316 C87.2@85.141,61.707 ; v1(84.416,65.303) 84.724,65.303 C86.2@85.115,65.695
-5.2V: C104.2 C105.2 P11.1 P11.2 R3.1 R5.1 R9.1 R11.1 R15.1 R17.1 R21.1 R23.1 R27.1 R29.1 R33.1 R35.1 R39.1 R41.1 R45.1 R47.1 R51.1 R53.1 R57.1 R59.1 R63.1 R65.1 R69.1 R71.1 R75.1 R77.1 R81.1 R83.1 R87.1 R89.1 R93.1 R95.1 R99.1 R101.1 R105.1 R107.1 R111.1 R113.1 R117.1 R119.1 R123.1 R125.1 R129.1 R131.1 R135.1 R137.1 R141.1 R143.1 R147.1 R149.1 R153.1 R155.1 R159.1 R161.1 R165.1 R167.1 R171.1 R173.1 R177.1 R179.1 R183.1 R185.1 R189.1 R191.1 R195.1 R197.1 R201.1 R203.1 R207.1 R209.1 R213.1 R215.1 R219.1 R221.1 R225.1 R227.1 R231.1 R233.1 R237.1 R239.1 | length 10.4
  Bottom Layer w0.762: C104.2@112.319,79.68 C105.2@114.605,79.68 114.925,80 P11.1@120,80 P11.2@122.54,80
  other v1: 84.531,26.314 100.635,26.314 68.631,26.34 52.756,26.391 36.805,26.518 100.635,29.159 84.557,29.185 52.756,29.21 68.656,29.286 36.805,29.413 84.531,32.029 100.635,32.055 68.555,32.08 52.756,32.106 36.805,32.258 84.455,34.9 100.635,34.925 68.605,34.95 52.756,35.001 36.805,35.179 84.557,37.77 100.635,37.795 52.756,37.846 68.656,37.857 36.805,38.024 84.531,40.64 100.635,40.691 52.756,40.716 68.605,40.716 36.805,40.919 84.48,43.51 100.635,43.561 52.756,43.586 68.605,43.612 36.805,43.79 84.48,46.355 68.631,46.431 52.756,46.457 100.635,46.457 36.805,46.66 52.578,82.271 100.559,82.271 36.551,82.423 68.758,82.525 84.887,82.525 100.559,85.09 52.578,85.141 68.758,85.268 36.551,85.293 84.887,85.344 100.533,87.909 52.578,87.979 68.758,88.087 84.887,88.087 36.551,88.145 100.533,90.754 52.578,90.83 68.758,90.932 84.887,90.932 36.551,90.957 100.533,93.548 52.578,93.65 84.887,93.701 68.758,93.777 36.551,93.802 100.533,96.393 84.887,96.469 52.578,96.52 68.758,96.52 36.551,96.647 84.887,99.263 100.533,99.263 52.578,99.365 68.758,99.365 36.551,99.492 84.887,102.057 100.508,102.057 68.758,102.133 52.578,102.21 36.551,102.311
CLKIN_LVCMOS33: P11.21 U1.T6 | length 38.5
  Top Layer w0.254: U1.T6@84.918,62.821 106.521,62.821 114.742,54.6 P11.21@120,54.6
DATAOUT_LVCMOS33: P11.25 U1.T4 | length 39.8
  Top Layer w0.254: U1.T4@84.918,60.821 103.441,60.821 114.742,49.52 P11.25@120,49.52
FBOUT_LVCMOS33: P11.23 U1.T5 | length 39.1
  Top Layer w0.254: U1.T5@84.918,61.821 104.981,61.821 114.742,52.06 P11.23@120,52.06